# Allegro board BeagleBone-AI_RevA2_PCB_200527.brd
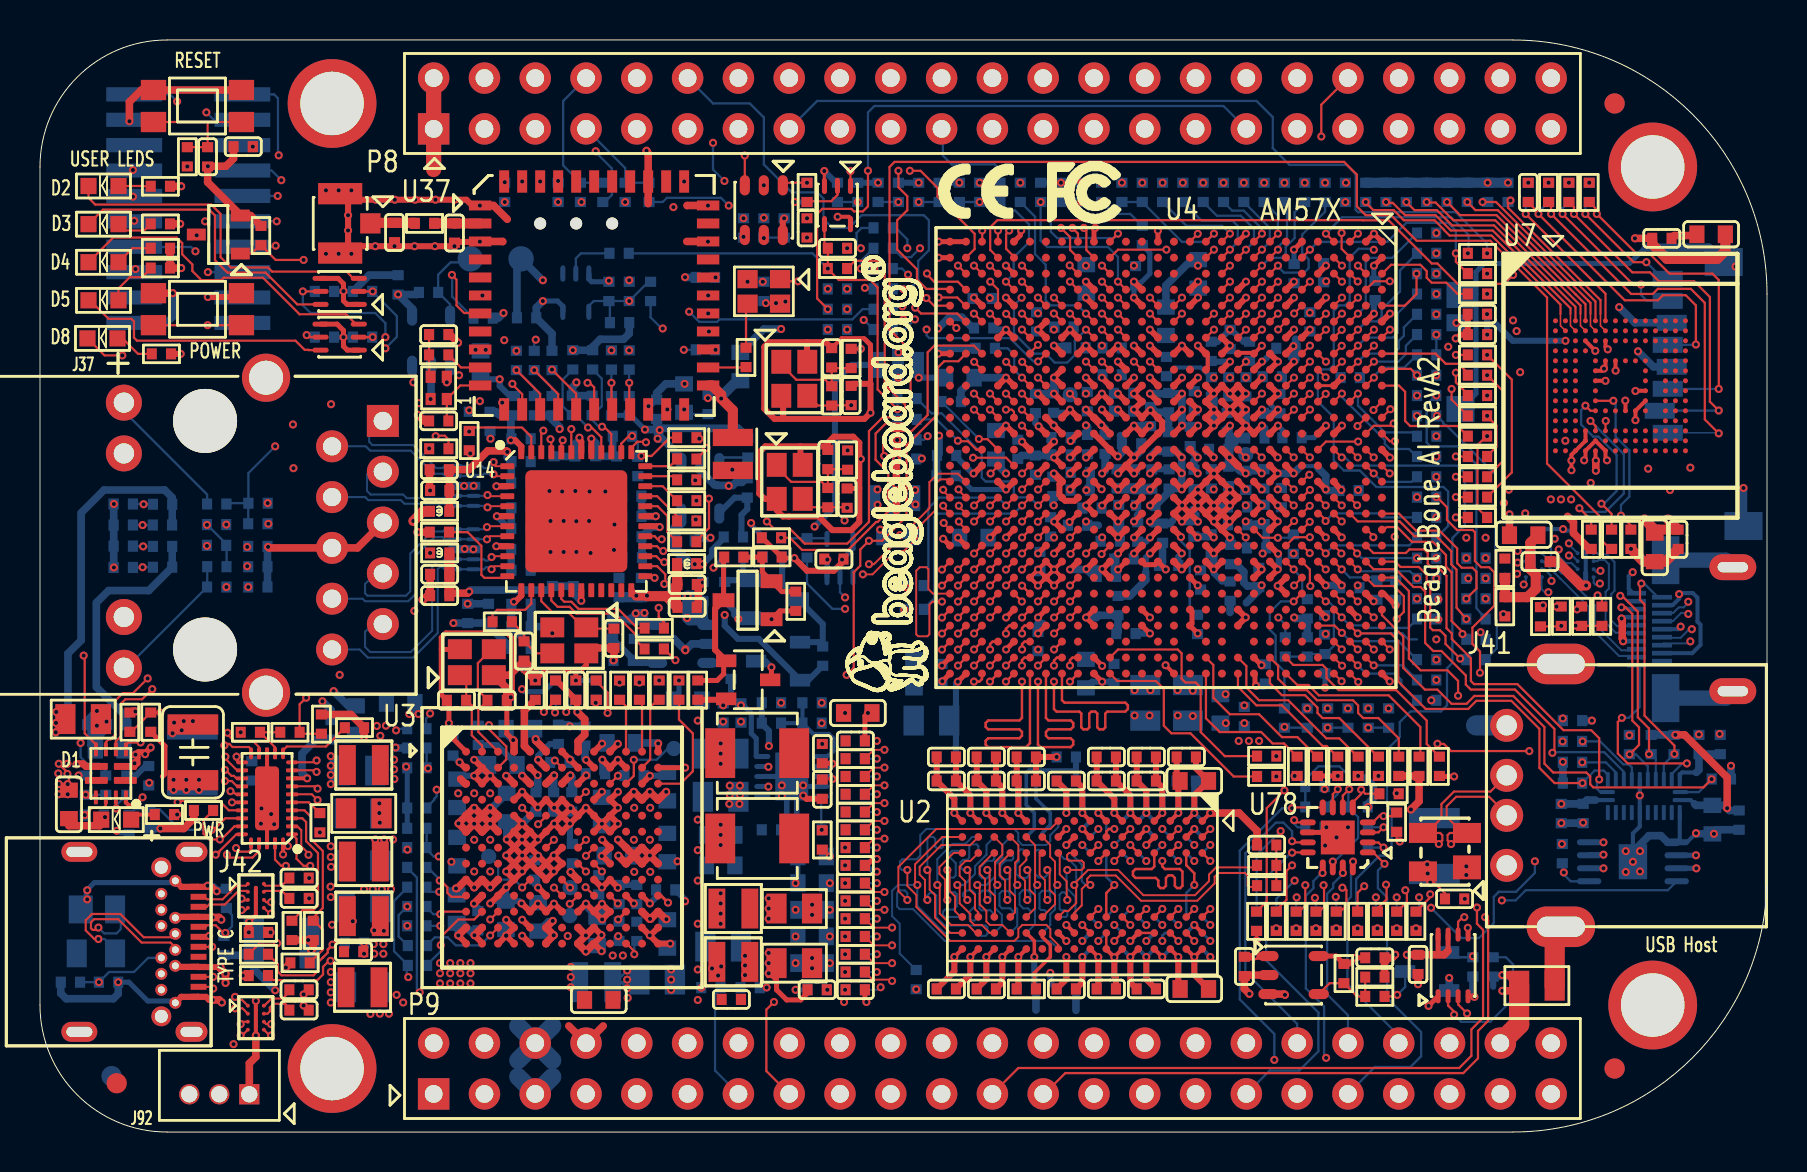
[diagram p0: board, top side]
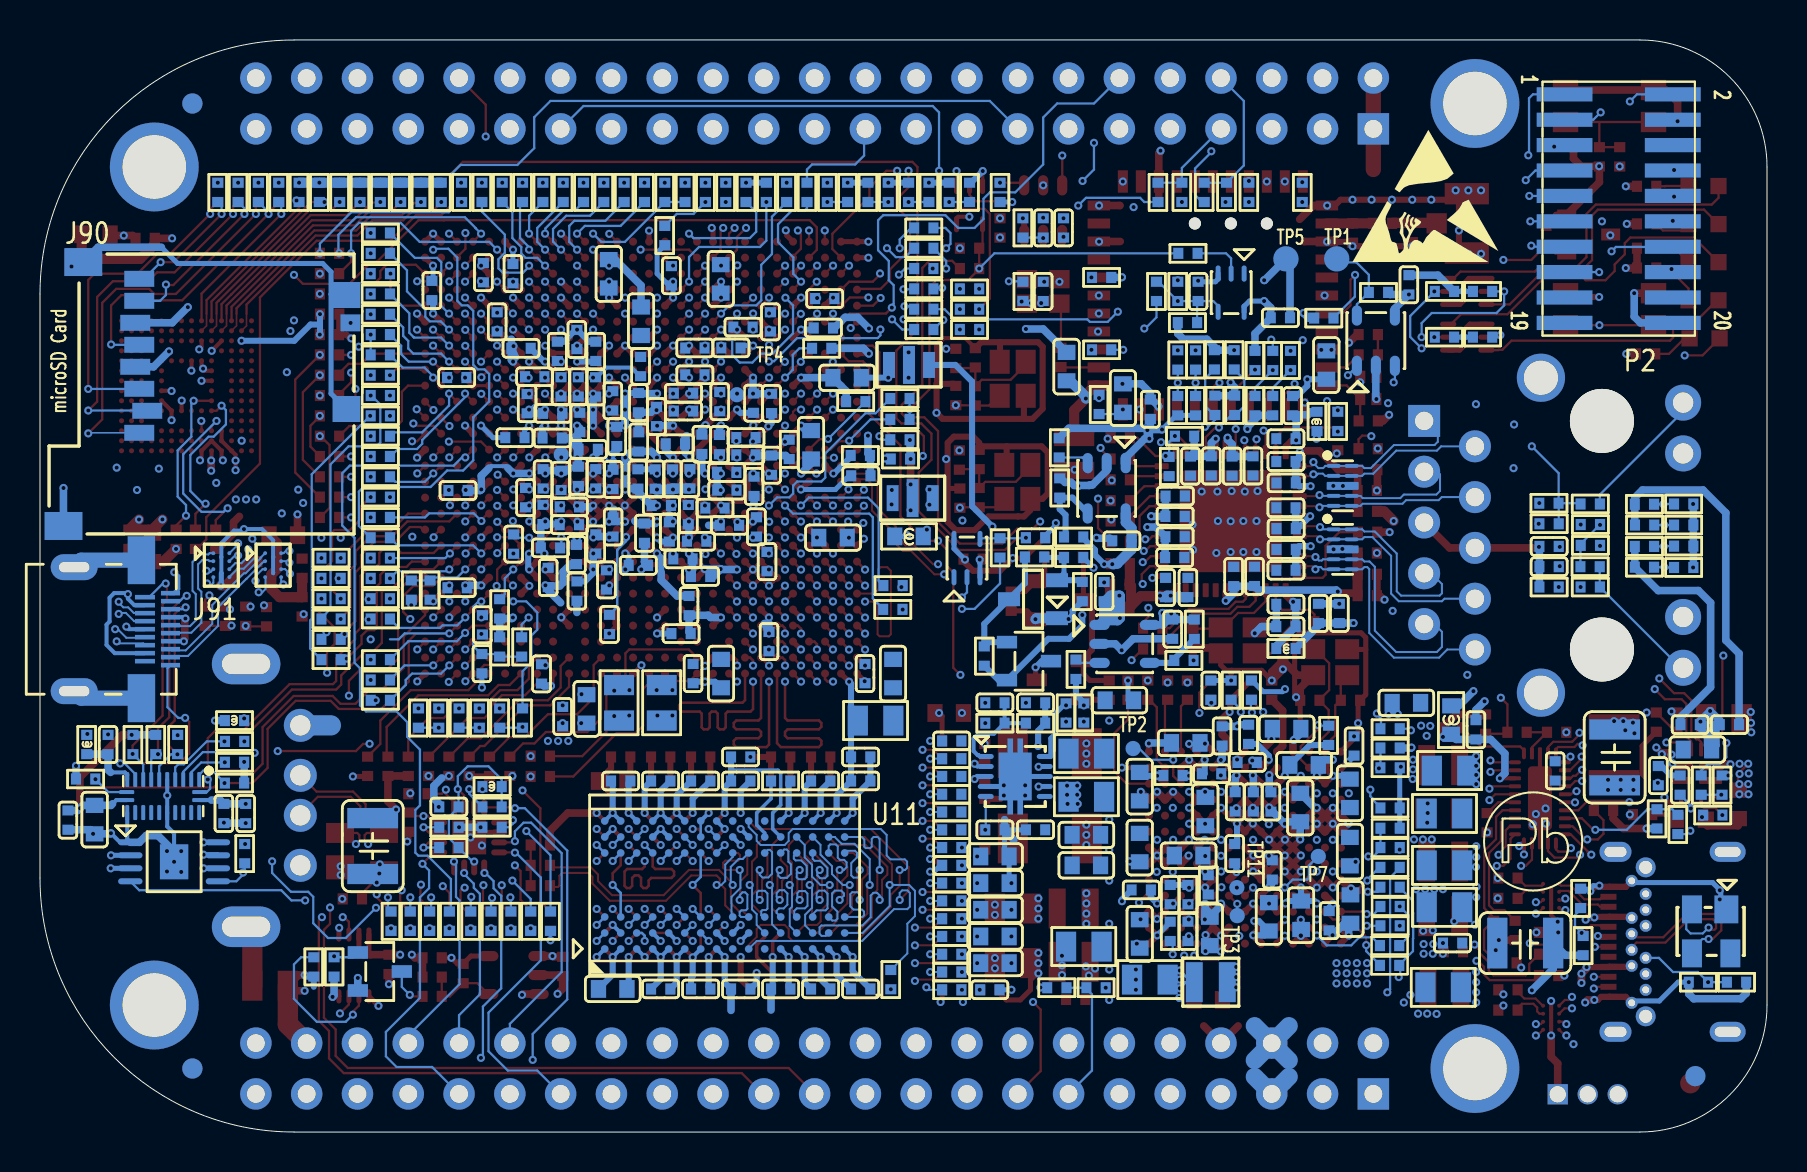
[diagram p1: board, bottom side, seen from below]

Outline 86.36 x 54.61 mm; copper layers: TOP, GND_L2, INT_L3, GND_L4, SIG_L5, PWR_L6, PWR_L7, SIG_L8, GND_L9, SIG_L10, GND_L11, BOTTOM. Coordinates in mm from the lower left corner of the outline.
Outline path: 0,48.26 0,6.35 arc(1.86,1.86) 6.35,0 73.66,0 arc(82.64,3.72) 86.36,12.7 86.36,41.91 arc(82.64,50.89) 73.66,54.61 6.35,54.61 arc(1.86,52.75) 0,48.26

## Design rules (mm)
constraint set DEFAULT: min track width 0.114, pair gap 0.254
net group DDR1_DQS0: nets DDR1_DQS0 DDR1_DQSN0
net group DDR1_DQS2: nets DDR1_DQS2 DDR1_DQSN2
net group DIFFPAIR2: nets DDR1_CLK0 DDR1_CLK0N
net group HDMI_CK: nets HDMI_CKN HDMI_CKP
net group HDMI_CLK: nets HDMI_CLKN HDMI_CLKP
net group HDMI_DATA0: nets HDMI_DATA0N HDMI_DATA0P
net group HDMI_DATA1: nets HDMI_DATA1N HDMI_DATA1P
net group HDMI_DATA2: nets HDMI_DATA2N HDMI_DATA2P
net group HDMI_T0: nets HDMI_T0N HDMI_T0P
net group HDMI_T1: nets HDMI_T1N HDMI_T1P
net group HDMI_T2: nets HDMI_T2N HDMI_T2P
net group PHY_TD_A: nets PHY_TD_A_M PHY_TD_A_P
net group PHY_TD_B: nets PHY_TD_B_M PHY_TD_B_P
net group PHY_TD_D: nets PHY_TD_D_M PHY_TD_D_P
net group PHY_TX_C: nets PHY_TD_C_M PHY_TD_C_P
net group SSRX1: nets SSRX1+ SSRX1-
net group SSRX1A: nets SSRX1N_A SSRX1P_A
net group SSRX2: nets SSRX2+ SSRX2-
net group SSRX2A: nets SSRX2N_A SSRX2P_A
net group SSTX1: nets SSTX1+ SSTX1-
net group SSTX1A: nets SSTX1N_A SSTX1P_A
net group SSTX1C: nets SSTX1N_C SSTX1P_C
net group SSTX2: nets SSTX2+ SSTX2-
net group SSTX2A: nets SSTX2N_A SSTX2P_A
net group SSTX2C: nets SSTX2N_C SSTX2P_C
net group USB1_D: nets USB1_DM USB1_DP
net group USB2_D: nets USB2_DM USB2_DP
net group USB_RXP0: nets USB_RXN0 USB_RXP0
net group USB_TXP0: nets USB_TXN0 USB_TXP0
net group DDR1_DQ0: nets DDR1_D0 DDR1_D1 DDR1_D2 DDR1_D3 DDR1_D4 DDR1_D5 DDR1_D6 DDR1_D7 DDR1_DQM0
net group DDR1_DQ1: nets DDR1_D8 DDR1_D9 DDR1_D10 DDR1_D11 DDR1_D12 DDR1_D13 DDR1_D14 DDR1_D15 DDR1_DQM1 DDR1_DQS1 DDR1_DQSN1
net group DDR1_DQ2: nets DDR1_D16 DDR1_D17 DDR1_D18 DDR1_D19 DDR1_D20 DDR1_D21 DDR1_D22 DDR1_D23 DDR1_DQM2
net group DDR1_DQ3: nets DDR1_D24 DDR1_D25 DDR1_D26 DDR1_D27 DDR1_D28 DDR1_D29 DDR1_D30 DDR1_D31 DDR1_DQM3 DDR1_DQS3 DDR1_DQSN3
net group MMC4_DAT: nets MMC4_DATA0 MMC4_DATA1 MMC4_DATA2 MMC4_DATA3
net group RGMIIO_RX: nets RGMII0_RXC RGMII0_RXCTL RGMII0_RXD0 RGMII0_RXD1 RGMII0_RXD2 RGMII0_RXD3
net group RGMIIO_TXC: nets RGMII0_TXC RGMII0_TXCTL RGMII0_TXD0 RGMII0_TXD1 RGMII0_TXD2 RGMII0_TXD3

## Placement (name value [footprint] x y rotation side)
C1  0.001uF  [C0402]  38.61 21.46 0 bottom
C2  4.7uF  [C0603]  22.03 38.35 270 bottom
C3  4.7uF  [C0603]  32.21 36.7 90 bottom
C4  10uF  [C0603]  40.89 20.96 180 top
C5  0.1uF  [C0402]  39.12 18.92 90 top
C6  0.1uF  [C0402]  39.12 17.14 270 top
C7  10uF  [C0603]  38.61 8.45 180 bottom
C8  0.1uF  [C0402]  36.58 15.11 0 bottom
C9  0.01uF  [C0402]  45.32 7.15 180 top
C10  0.01uF  [C0402]  53.32 18.75 0 top
C11  0.01uF  [C0402]  55.32 18.75 0 top
C12  47uF  [C0805]  37.72 11.18 0 top
C13  24pF  [C0402]  40.36 31.7 90 top
C14  24pF  [C0402]  39.4 33.63 90 top
C15  24pF  [C0402]  40.56 36.83 90 top
C16  24pF  [C0402]  39.59 38.72 90 top
C17  0.01uF  [C0402]  47.32 18.75 180 top
C18  0.01uF  [C0402]  45.32 18.75 180 top
C19  0.01uF  [C0402]  47.32 17.55 180 top
C20  0.1uF  [C0402]  51.32 17.55 180 top
C21  2.2uF  [C0603]  18.03 21.46 180 bottom
C22  0.01uF  [C0402]  45.32 17.55 180 top
C23  0.01uF  [C0402]  49.32 17.55 180 top
C24  0.01uF  [C0402]  53.32 17.55 0 top
C25  0.01uF  [C0402]  55.32 17.55 0 top
C26  47uF  [C0805]  44.58 20.57 180 bottom
C27  0.1uF  [C0402]  17.91 42.37 270 bottom
C28  0.1uF  [C0402]  14.55 20.11 90 bottom
C29  47uF  [C1210]  12.09 9.45 180 bottom
C30  4.7uF  [C0603]  83.63 15.62 270 bottom
C31  220pF  [C0402]  84.96 15.6 270 bottom
C32  220pF  [C0402]  77.17 15.93 270 bottom
C33  4.7uF  [C0603]  3.48 19.13 180 bottom
C34  0.1uF  [C0402]  3.84 20.37 180 bottom
C35  0.1uF  [C0402]  51.32 7.15 180 top
C36  0.01uF  [C0402]  55.32 7.15 0 top
C37  10uF  [C0603]  46 37.72 0 bottom
C38  2.2uF  [C0402]  26.8 22.1 90 top
C39  22uF  [C0603]  57.72 7.15 0 top
C40  0.01uF  [C0402]  53.32 7.15 0 top
C41  0.1uF  [C0402]  38.86 7.11 180 bottom
C42  0.1uF  [C0402]  40.77 7.11 0 top
C43  2.2uF  [C0402]  24.77 22.1 90 top
C44  1uF  [C0402]  4.34 17.35 90 bottom
C45  10UF  [C0402]  19.99 27.89 180 top
C46  0.01uF  [C0402]  19.99 26.82 180 top
C47  1uF  [C0402]  28.83 33.3 270 bottom
C48  0.1uF  [C0402]  27.79 33.31 270 bottom
C49  0.1uF  [C0402]  61.34 14.35 180 top
C50  1uF  [C0402]  29.62 28.73 180 bottom
C51  15pF  [C0402]  22.86 21.59 180 top
C52  15pF  [C0402]  20.83 21.59 0 top
C53  0.1uF  [C0402]  29.6 29.77 180 bottom
C54  1uF  [C0402]  25.63 27.79 90 bottom
C55  0.1uF  [C0402]  26.67 27.78 90 bottom
C56  10UF  [C0402]  19.99 32.08 180 top
C57  0.01uF  [C0402]  19.96 33.12 180 top
C58  22uF  [C0603]  57.72 7.15 0 bottom
C59  1uF  [C0402]  24.05 28.09 0 bottom
C60  0.1uF  [C0402]  38.86 7.11 180 top
C61  0.1uF  [C0402]  40.77 13.34 0 top
C62  0.1uF  [C0402]  24.05 29.13 0 bottom
C63  1uF  [C0402]  24.05 33.53 0 bottom
C64  0.1uF  [C0402]  24.05 32.46 0 bottom
C65  10UF  [C0402]  32.36 27.38 0 top
C66  0.01uF  [C0402]  32.36 26.24 0 top
C67  1uF  [C0402]  29.59 31.8 180 bottom
C68  15pF  [C0402]  19.94 35.56 180 top
C69  0.1uF  [C0402]  36.58 29.72 180 bottom
C70  0.1uF  [C0402]  29.6 30.78 180 bottom
C71  1uF  [C0402]  25.7 33.31 270 bottom
C72  0.1uF  [C0402]  26.75 33.3 270 bottom
C73  1uF  [C0402]  24.05 31.22 0 bottom
C74  0.1uF  [C0402]  24.05 30.18 0 bottom
C75  1uF  [C0402]  28.96 27.23 90 bottom
C76  0.1uF  [C0402]  30.07 27.23 90 bottom
C77  1uF  [C0402]  29.72 25.15 270 bottom
C78  1uF  [C0402]  33.15 27.03 90 bottom
C79  0.01uF  [C0402]  39.7 28.65 180 top
C80  0.1uF  [C0402]  39.88 44.2 0 top
C81  0.1uF  [C0402]  35.18 45.21 270 bottom
C82  1uF  [C0402]  30.84 36.14 90 bottom
C83  1uF  [C0402]  32.26 29.57 0 bottom
C84  0.01uF  [C0402]  24.33 40.72 180 bottom
C85  1uF  [C0402]  24.05 25.27 0 bottom
C86  0.1uF  [C0402]  24.05 26.39 0 bottom
C87  0.1uF  [C0402]  36.2 45.21 270 bottom
C88  0.1uF  [C0402]  38.35 45.21 90 top
C89  10uF  [C0603]  57.72 17.55 0 top
C90  10uF  [C0603]  38.61 13.78 180 bottom
C91  10uF  [C0603]  38.61 12.45 180 bottom
C92  10pF  [C0402]  38.61 15.11 180 bottom
C93  47uF  [C0805]  34.16 9.27 180 bottom
C94  47uF  [C0805]  37.72 8.45 0 top
C95  0.01uF  [C0402]  45.32 7.15 180 bottom
C96  22uF  [C0603]  34.04 14.86 180 bottom
C97  0.01uF  [C0402]  45.32 18.75 180 bottom
C98  0.1uF  [C0402]  51.32 17.55 180 bottom
C99  0.1uF  [C0402]  51.32 18.75 0 bottom
C100  0.01uF  [C0402]  57.32 17.55 0 bottom
C101  0.01uF  [C0402]  55.32 17.55 0 bottom
C102  0.01uF  [C0402]  53.32 17.55 0 bottom
C103  0.01uF  [C0402]  47.32 17.55 180 bottom
C104  0.01uF  [C0402]  45.32 17.55 180 bottom
C105  47uF  [C0805]  34.04 18.92 180 bottom
C106  1uF  [C0402]  51.06 34.73 180 bottom
C107  1uF  [C0402]  51.06 33.86 180 bottom
C108  1uF  [C0402]  52.02 32.99 0 bottom
C109  1uF  [C0402]  52.01 32.1 0 bottom
C110  10UF  [C0402]  28.96 10.03 270 bottom
C111  47uF  [C0805]  34.04 16.76 180 bottom
C112  10UF  [C0402]  59.54 28.88 270 bottom
C113  10uF  [C0603]  31.37 9.91 270 bottom
C114  4.7uF  [C0603]  31.37 14.22 270 bottom
C115  4.7uF  [C0603]  31.37 17.27 90 bottom
C116  10uF  [C0603]  47.8 34.37 90 bottom
C117  2.2uF  [C0402]  31.29 12.11 0 bottom
C118  0.01uF  [C0402]  45.1 22.92 270 bottom
C119  0.01uF  [C0402]  54.3 24.92 180 bottom
C120  10uF  [C0603]  43.7 22.92 270 bottom
C121  2.2uF  [C0402]  29.84 11.87 90 bottom
C122  0.01uF  [C0402]  47.12 41.68 0 bottom
C123  0.1uF  [C0402]  45.31 32.82 180 bottom
C124  10uF  [C0603]  46.7 29.73 0 bottom
C125  0.01uF  [C0402]  47.19 40.21 180 bottom
C126  2.2uF  [C0603]  29.07 19.46 0 bottom
C127  4.7uF  [C0603]  28.92 13.82 180 bottom
C128  4.7uF  [C0603]  27.94 6.6 0 top
C129  10UF  [C0402]  21.39 25.93 90 bottom
C130  10uF  [C0603]  28.09 16.03 270 bottom
C131  0.01uF  [C0402]  49.9 24.52 270 bottom
C132  4.7uF  [C0603]  27.86 10.03 90 bottom
C133  2.2uF  [C0402]  27.77 17.92 0 bottom
C134  2.2uF  [C0402]  27.25 19.81 90 bottom
C135  0.01uF  [C0402]  22.43 25.93 90 bottom
C136  0.01uF  [C0402]  49.78 36.43 90 bottom
C137  1uF  [C0402]  23.72 36.32 90 bottom
C138  0.01uF  [C0402]  49.78 33.35 90 bottom
C139  0.01uF  [C0402]  26.59 16.51 270 bottom
C140  0.01uF  [C0402]  50 28.52 90 bottom
C141  0.01uF  [C0402]  47.32 7.15 180 bottom
C142  0.1uF  [C0402]  24.05 34.67 0 bottom
C143  0.1uF  [C0402]  51.32 7.15 0 bottom
C144  0.1uF  [C0402]  49.32 7.15 180 bottom
C145  0.01uF  [C0402]  26.62 13.92 90 bottom
C146  0.01uF  [C0402]  50.53 30.26 270 bottom
C147  0.1uF  [C0402]  26 18.48 180 bottom
C148  0.01uF  [C0402]  50.68 36.45 90 bottom
C149  0.1uF  [C0402]  50.65 32.29 270 bottom
C151  2.2uF  [C0402]  25.69 16.51 270 bottom
C152  2.2uF  [C0402]  25.92 19.89 90 bottom
C153  0.1uF  [C0402]  40.77 13.34 0 bottom
C154  0.01uF  [C0402]  51.21 40.25 180 bottom
C155  0.01uF  [C0402]  49.83 40.51 90 bottom
C156  4.7uF  [C0603]  24.91 10.76 90 bottom
C157  2.2uF  [C0402]  24.81 16.5 270 bottom
C158  0.01uF  [C0402]  51.88 30.34 0 bottom
C159  0.1uF  [C0402]  52.38 34.38 90 bottom
C161  10uF  [C0603]  52.32 42.66 90 bottom
C162  0.01uF  [C0402]  53.7 22.92 270 bottom
C163  0.1uF  [C0402]  52.37 36.52 90 bottom
C164  2.2uF  [C0603]  24.02 20.17 180 bottom
C165  0.01uF  [C0402]  52.61 31.2 0 bottom
C166  0.01uF  [C0402]  53.32 7.15 0 bottom
C168  10UF  [C0402]  60.22 20.78 90 bottom
C169  2.2uF  [C0603]  23.34 16.23 270 bottom
C170  10uF  [C0603]  23.3 10.84 90 bottom
C171  0.01uF  [C0402]  54.58 34.42 0 bottom
C172  2.2uF  [C0603]  23.15 18.36 0 bottom
C174  0.01uF  [C0402]  53.33 27.78 0 bottom
C175  0.01uF  [C0402]  53.52 29.54 180 bottom
C176  10UF  [C0402]  53.61 39.21 180 bottom
C177  10UF  [C0402]  53.61 37.87 0 bottom
C178  0.01uF  [C0402]  53.86 32.67 90 bottom
C179  1uF  [C0402]  54.21 28.66 180 bottom
C180  10uF  [C0603]  52.3 22.92 270 bottom
C181  0.01uF  [C0402]  53.94 30.88 90 bottom
C182  0.01uF  [C0402]  54.18 36.95 0 bottom
C183  10UF  [C0402]  54.18 36.05 0 bottom
C184  0.1uF  [C0402]  53.26 34.39 270 bottom
C185  0.01uF  [C0402]  54.73 32.66 90 bottom
C186  0.01uF  [C0402]  54.79 42.82 90 bottom
C187  0.01uF  [C0402]  54.89 30.01 90 bottom
C188  22uF  [C0603]  59.03 21.16 90 bottom
C189  0.01uF  [C0402]  55.29 31.33 180 bottom
C190  0.01uF  [C0402]  55.53 35.78 90 bottom
C192  47uF  [C0805]  30.86 7.62 0 bottom
C193  0.01uF  [C0402]  55.6 32.66 90 bottom
C194  4.7uF  [C0603]  20.83 11.15 270 bottom
C195  4.7uF  [C0603]  20.86 14.02 270 bottom
C196  4.7uF  [C0603]  20.86 16.94 90 bottom
C197  0.01uF  [C0402]  56.13 29.95 270 bottom
C198  10uF  [C0603]  56.3 40.54 90 bottom
C199  0.01uF  [C0402]  56.42 34.51 90 bottom
C200  10UF  [C0402]  56.44 36.48 270 bottom
C201  0.01uF  [C0402]  56.44 28.34 180 bottom
C202  0.01uF  [C0402]  56.46 32.66 90 bottom
C203  0.01uF  [C0402]  57.51 34.78 270 bottom
C204  1uF  [C0402]  53.9 26.32 270 bottom
C205  0.01uF  [C0402]  57.7 32.64 90 bottom
C206  0.01uF  [C0402]  57.7 30.26 270 bottom
C207  0.01uF  [C0402]  57.72 36.57 90 bottom
C208  10uF  [C0603]  57.92 42.92 90 bottom
C209  0.01uF  [C0402]  58.03 27.61 90 bottom
C210  0.01uF  [C0402]  56.33 38.28 270 bottom
C211  0.01uF  [C0402]  58.57 29.41 90 bottom
C212  0.01uF  [C0402]  58.57 32.67 270 bottom
C213  0.01uF  [C0402]  49.32 18.75 180 top
C214  1uF  [C0402]  57.88 25.38 270 bottom
C215  10UF  [C0402]  58.58 37.26 90 bottom
C216  1uF  [C0402]  58.94 34.14 0 bottom
C217  10UF  [C0402]  59.37 35.48 270 bottom
C218  0.01uF  [C0402]  59.51 39.63 90 bottom
C220  0.01uF  [C0402]  59.44 37.26 90 bottom
C221  0.01uF  [C0402]  59.89 31.26 0 bottom
C222  0.01uF  [C0402]  59.89 30.37 0 bottom
C223  0.01uF  [C0402]  59.44 32.79 90 bottom
C224  0.01uF  [C0402]  59.51 27.05 270 bottom
C225  0.1uF  [C0402]  40.77 19.56 0 top
C226  0.1uF  [C0402]  40.77 19.56 0 bottom
C227  0.01uF  [C0402]  55.32 7.15 0 bottom
C230  0.01uF  [C0402]  47.32 7.15 180 top
C231  0.01uF  [C0402]  57.32 18.75 0 top
C232  0.01uF  [C0402]  60.31 37.26 90 bottom
C233  0.01uF  [C0402]  60.72 35.94 0 bottom
C234  0.01uF  [C0402]  60.75 34.71 180 bottom
C235  0.01uF  [C0402]  60.95 27.73 270 bottom
C236  0.01uF  [C0402]  61.21 30.88 270 bottom
C237  0.01uF  [C0402]  61.28 22.91 270 bottom
C238  0.01uF  [C0402]  24.74 13.11 90 bottom
C242  0.01uF  [C0402]  62.61 34.72 0 bottom
C245  0.01uF  [C0402]  62 36.42 270 bottom
C254  1uF  [C0402]  60.83 29.21 0 bottom
C255  0.01uF  [C0402]  15.68 9.02 0 top
C256  0.01uF  [C0402]  21.89 10.57 270 bottom
C257  0.01uF  [C0402]  15.72 9.45 0 bottom
C258  0.01uF  [C0402]  20.65 19.3 90 bottom
C259  0.01uF  [C0402]  62.71 42.92 90 bottom
C260  1uF  [C0402]  62.67 29.4 270 bottom
C261  0.01uF  [C0402]  64.19 42.97 270 bottom
C262  0.01uF  [C0402]  64.24 25.36 270 bottom
C263  47uF  [C0805]  16.13 11.24 0 bottom
C264  47uF  [C0805]  16.19 7.24 0 bottom
C265  47uF  [C0805]  16.13 13.34 0 bottom
C266  47uF  [C0805]  16.19 15.94 0 top
C267  0.1uF  [C0402]  64.26 23.42 270 bottom
C268  1.5pF  [C0402]  17.73 44.98 270 top
C269  0.01uF  [C0402]  65.46 32.08 0 bottom
C270  0.01uF  [C0402]  65.5 27.22 0 bottom
C271  0.01uF  [C0402]  65.52 37.73 0 bottom
C272  0.01uF  [C0402]  66.77 42.08 90 bottom
C273  1uF  [C0402]  61.2 32.66 90 bottom
C274  1uF  [C0402]  62.31 39.19 0 bottom
C275  1uF  [C0402]  61.62 37.77 0 bottom
C276  1uF  [C0402]  58.57 39.04 90 bottom
C277  1uF  [C0402]  60.49 39.04 90 bottom
C278  2.2uF  [C0603]  80.75 29.24 270 top
C279  1uF  [C0402]  60.3 32.59 90 bottom
C281  0.1uF  [C0402]  71.88 39.88 180 top
C282  2.2uF  [C0603]  74.19 29.85 180 top
C283  1uF  [C0402]  71.88 40.9 0 top
C285  0.1uF  [C0402]  75.01 28.52 0 top
C286  0.1uF  [C0402]  81.92 29.64 270 top
C291  10uF  [C0603]  38.61 11.11 180 bottom
C292  10uF  [C0603]  38.61 9.78 180 bottom
C293  47uF  [C0805]  55.27 21.46 90 bottom
C294  47uF  [C0805]  57.4 21.46 90 bottom
C295  10uF  [C0603]  34.04 13.34 180 bottom
C296  10UF  [C0402]  34.57 6.63 180 top
C297  47uF  [C0805]  15.88 18.07 0 bottom
C298  47uF  [C0805]  16.13 15.93 0 bottom
C299  0.01uF  [C0402]  62.08 31.72 90 bottom
C300  10uF  [C0603]  83.57 44.89 0 top
C320  0.1uF  [C0402]  27.81 22.1 90 bottom
C321  0.1uF  [C0402]  8.38 48.77 270 top
C325  0.1uF  [C0402]  81.1 44.69 0 top
C326  47uF  [C1210]  69.72 14.3 90 bottom
C327  0.1uF  [C0402]  70.74 11.66 180 top
C334  27pF  [C0402]  28.7 24.69 270 top
C335  0.1uF  [C0402]  10.9 29.29 180 bottom
C336  0.1uF  [C0402]  10.9 28.27 180 bottom
C337  27pF  [C0402]  24.21 24.05 270 top
C353  0.1uF  [C0402]  68.91 8.38 90 top
C443  0.1uF  [C0402]  12.95 12.7 0 top
C444  0.1uF  [C0402]  12.95 11.68 0 top
C445  0.1uF  [C0402]  12.95 6.1 0 top
C446  0.1uF  [C0402]  12.95 7.11 0 top
C456  4.7uF  [C0603]  1.45 16.38 270 top
C457  0.1uF  [C0402]  1.88 20.37 0 bottom
C461  10uF  [C0603]  32.39 21.59 180 bottom
C462  0.001uF  [C0402]  36.58 21.46 0 bottom
C463  15pF  [C0402]  19.94 39.88 0 top
C464  4.7uF  [C0603]  35.03 38.28 90 bottom
C466  0.1uF  [C0402]  65.91 16.26 0 bottom
C472  0.1uF  [C0402]  36.2 42.04 90 bottom
C473  5pF  [C0402]  74.42 46.99 90 top
C480  1uF  [C0402]  10.59 18.06 90 bottom
C481  100uF  [C1210]  7.62 18.73 90 bottom
C482  100uF  [C1210]  7.65 18.99 90 top
C483  0.01uF  [C0402]  5.44 17.82 90 bottom
C488  1pF  [C0402]  20.73 44.96 270 top
C489  1uF  [C0402]  60.22 8.28 270 top
C490  1uF  [C0402]  66.75 8.71 0 top
C491  0.1uF  [C0402]  10.16 49.28 180 top
C492  0.1uF  [C0402]  51.81 39.21 180 bottom
C495  1uF  [C0402]  28.45 42.04 90 bottom
C496  0.1uF  [C0402]  63.5 40.51 270 bottom
C497  0.1uF  [C0402]  76.07 15.93 270 bottom
C498  0.1uF  [C0402]  82.96 19.38 90 bottom
D1  Green  [D0603]  3.81 15.62 180 top
D2  Green  [D0603]  3.18 47.31 180 top
D3  Green  [D0603]  3.18 45.4 180 top
D4  Green  [D0603]  3.18 43.5 180 top
D5  Green  [D0603]  3.18 41.59 180 top
D6  TLVH431CDBZT  [SOT95P240X120-3N]  36.7 26.64 0 bottom
D7  TLVH431CDBZT  [SOT95P240X120-3N]  35.38 26.59 180 top
D8  Green  [D0603]  3.12 39.69 180 top
D46  ESD0402-V05L  [D0402]  9.19 9.32 90 bottom
D47  ESD0402-V05L  [D0402]  3.43 7.49 180 bottom
D78  PRTR5V0U2X,215  [SOT143_190P240X115-4N]  2.79 10.03 0 bottom
D79  PRTR5V0U2X,215  [SOT143_190P240X115-4N]  70.26 14 90 top
FB1  180R  [L0603]  15.8 20.6 270 bottom
FB2  120ohm  [L0402]  24.05 24.18 0 bottom
FB3  120ohm  [L0402]  19.99 28.96 0 top
FB4  120ohm  [L0402]  76.63 20.57 180 bottom
FB5  120ohm  [L0402]  63.75 17.27 180 bottom
FB6  180R  [L0603]  42.91 29.79 0 bottom
FB7  120ohm  [L0402]  84.02 19.38 270 bottom
FB8  120ohm  [L0402]  19.98 31.04 0 top
FB9  120ohm  [L0402]  32.34 28.42 180 top
FB10  120ohm  [L0402]  22.5 35.53 90 bottom
FL1  NFM21PC474R1C3D  [FL0805]  42.91 38.36 0 bottom
FL2  NFM21PC474R1C3D  [FL0805]  42.72 31.7 0 bottom
ID1  NI  [FD40]  78.74 51.43 0 top
ID2  NI  [FD40]  78.74 3.17 0 top
ID3  NI  [FD40]  3.84 2.44 0 top
J33  U.FL-R-SMT-1(10)  [ANT3S_26X26]  15.01 45.44 90 top
J37  JTRJ45-4118NLF  [RJ45_MTCONN_JTRJ45-4118NLF]  8.16 29.85 270 top
J41  UB11123-4H9-4F  [USB_A_SH]  76.05 16.84 90 top
J42  UBF31-0170  [USB_MTCONN_UBF31-0170]  7.88 9.51 270 top
J90  MCTF-0606  [SD_HSF-COMPLIANT_MCTF-0606]  78.26 36.91 90 bottom
J91  10118241-001RLF  [HDMIS19_4P4]  84.65 25.15 270 bottom
J92  B3B-ZR(LF)(SN)  [CON3B35X60]  8.97 2.34 180 top
L1  1uH  [L40X40_B]  35.86 18.95 0 top
L2  1uH  [L40X40_B]  35.86 14.68 0 top
L16  1uH  [INDPW250X200X105N]  34.67 11.18 0 top
L17  1uH  [INDPW250X200X105N]  16.19 13.53 180 top
L18  1uH  [INDPW250X200X105N]  16.19 10.79 180 top
L19  1uH  [INDPW250X200X105N]  16.13 7.24 180 top
L20  1uH  [INDPW250X200X105N]  16.19 18.35 180 top
L21  1uH  [INDPW250X200X105N]  34.67 8.51 0 top
L22  1uH  [INDPW250X200X105N]  27.81 7.49 0 bottom
L30  4.7uH  [L25X20]  34.65 33.91 90 top
MH1  NI  [MTGH200C125D_PL]  80.65 48.26 0 top
MH2  NI  [MTGH200C125D_PL]  14.61 51.43 0 top
MH3  NI  [MTGH200C125D_PL]  80.65 6.35 0 top
MH4  NI  [MTGH200C125D_PL]  14.61 3.17 0 top
NOREF  -  []  0 48.26 0 top
NOREF#2  -  []  -235.81 -133.55 0 top
NOREF#3  -  []  6.35 0 90 top
NOREF#4  -  [unnamed#2]  78.74 3.17 180 bottom
NOREF#5  -  []  21.23 43.69 180 bottom
NOREF#6  -  [unnamed#2]  78.74 51.43 180 bottom
NOREF#7  -  [unnamed#2]  3.58 2.79 180 bottom
OSC1  32.768KHz  [X4S25X20]  36.2 42.04 180 top
P2  CTI JTAG,DNI  [HEADER10X2_SMD]  7.42 46.18 270 bottom
P8  2.54mm 2x23  [H2X23MZ]  47.62 51.43 0 top
P9  2.54mm 2x23  [H2X23MZ]  47.62 3.17 0 top
Q1  MMBT2907A  [SOT23_123]  36.91 23.55 270 bottom
Q4  MMBT2907A  [SOT23_123]  35.41 22.61 270 top
Q17  2N7002  [SOT23_123]  69.37 8.03 270 bottom
Q18  BSS138LT1G  [SOT95P240X111-3N]  8.92 44.88 180 top
R1  10K  [R0402]  38.61 20.45 0 bottom
R2  10K  [R0402]  36.58 20.45 180 bottom
R3  100K  [R0402]  35.05 20.96 90 bottom
R4  10K  [R0402]  34.16 20.96 90 bottom
R5  0R  [R0402]  35.51 7.21 180 bottom
R6  0R  [R0402]  33.55 7.21 0 bottom
R7  0R  [R0402]  45.34 33.83 0 bottom
R8  10K  [R0402]  34.67 28.73 0 bottom
R9  499R  [R0402]  39.14 23.8 90 bottom
R10  0R  [R0402]  48.89 34.14 90 bottom
R11  1M  [R0402]  39.4 31.72 90 top
R12  1M  [R0402]  39.59 36.81 90 top
R13  10K  [R0402]  36.63 28.75 0 bottom
R14  0R  [R0402]  40.39 33.6 270 top
R15  0R  [R0402]  40.56 38.68 270 top
R16  10K  [R0402]  84.08 17.65 180 bottom
R17  40.2K  [R0402]  34.24 27.03 270 bottom
R18  10K  [R0402]  31.95 22.1 270 top
R19  10K  [R0402]  30.96 22.1 270 top
R20  10K  [R0402]  29.97 22.1 270 top
R21  10K  [R0402]  19.43 41.99 0 bottom
R22  240R  [R0402]  49.32 7.15 180 top
R23  0R  [R0402]  27.03 46.99 90 bottom
R24  10K  [R0402]  51.05 46.99 90 bottom
R25  47R  [R0402]  40.77 18.67 180 top
R26  49.9R  [R0402]  61.34 12.32 0 top
R27  10K  [R0402]  25.78 22.1 270 top
R28  0R  [R0402]  29.26 46.99 90 bottom
R29  49.9R  [R0402]  61.34 13.34 0 top
R30  47R  [R0402]  40.77 17.78 180 bottom
R31  47R  [R0402]  40.77 16 180 bottom
R32  909K  [R0402]  14 15.47 90 top
R33  47R  [R0402]  40.77 17.78 180 top
R34  47R  [R0402]  40.77 10.67 180 top
R35  200K  [R0402]  13.67 10.08 90 top
R36  47R  [R0402]  40.77 9.78 180 top
R37  47R  [R0402]  40.77 9.78 180 bottom
R38  100K  [R0402]  54.1 46.99 270 bottom
R39  47R  [R0402]  40.77 8.89 180 bottom
R40  47R  [R0402]  40.77 10.67 180 bottom
R41  10K  [R0402]  12.6 10.08 90 top
R42  47R  [R0402]  40.77 8.89 180 top
R43  47R  [R0402]  40.77 16.89 180 bottom
R44  100K  [R0402]  56.13 46.99 270 bottom
R45  200K  [R0402]  15.72 20.22 180 top
R46  0R  [R0402]  10.52 19.99 180 top
R47  0R  [R0402]  12.5 19.99 180 top
R48  0R  [R0402]  10.92 8.89 0 top
R49  0R  [R0402]  10.92 7.82 0 top
R50  0R  [R0402]  10.92 9.98 180 top
R51  200K  [R0402]  14.07 20.4 270 top
R52  200K  [R0402]  8.18 16.08 0 top
R53  200K  [R0402]  5.5 15.66 90 bottom
R54  10K  [R0402]  36.58 29.72 0 top
R55  0R  [R0402]  38.35 29.21 270 bottom
R56  0R  [R0402]  78.59 29.64 270 top
R57  18K  [R0402]  62.23 20.7 270 bottom
R58  20K  [R0402]  63.37 20.7 90 bottom
R59  10K  [R0402]  5.54 20.5 90 top
R60  0R  [R0402]  4.5 20.5 90 top
R61  10K  [R0402]  76.63 19.53 0 bottom
R62  4.7K  [R0402]  76.63 17.45 180 bottom
R63  4.7K  [R0402]  76.63 18.49 180 bottom
R64  4.7K  [R0402]  81.71 19.38 90 bottom
R65  4.7K  [R0402]  80.57 19.38 90 bottom
R66  10K  [R0402]  79.48 19.38 270 bottom
R67  0R  [R0402]  30.45 46.99 90 bottom
R68  0R  [R0402]  28.14 46.99 90 bottom
R69  0R  [R0402]  4.46 15.38 270 bottom
R70  0R  [R0402]  39.88 43.18 0 top
R71  13K  [R0402]  6.13 31.39 180 bottom
R72  4.7K  [R0402]  4.17 31.41 180 bottom
R73  4.7K  [R0402]  4.17 30.35 180 bottom
R74  10K  [R0402]  37.21 45.21 270 bottom
R75  11K  [R0402]  6.13 28.24 180 bottom
R76  20K  [R0402]  6.13 29.29 180 bottom
R77  0R  [R0402]  4.17 28.23 180 bottom
R78  4.7K  [R0402]  4.17 29.3 180 bottom
R79  30K  [R0402]  2.71 15.85 0 bottom
R80  10K  [R0402]  2.25 17.35 270 bottom
R81  0R  [R0402]  3.29 17.35 90 bottom
R82  10K  [R0402]  38.35 46.99 90 bottom
R83  100R  [R0402]  38.35 46.99 270 top
R84  10R  [R0402]  39.12 14.61 90 top
R85  499R  [R0402]  32.89 22.1 90 top
R86  10K  [R0402]  34.7 28.75 180 top
R87  10K  [R0402]  36.6 28.75 180 top
R88  240R  [R0402]  49.32 17.55 180 bottom
R89  0R  [R0402]  43.36 35.64 180 bottom
R90  0R  [R0402]  43.36 36.68 180 bottom
R91  40.2K  [R0402]  37.8 26.54 270 top
R92  22R  [R0402]  42.16 45.21 180 bottom
R93  22R  [R0402]  42.16 44.2 180 bottom
R94  22R  [R0402]  42.16 43.18 180 bottom
R95  22R  [R0402]  42.16 42.16 180 bottom
R96  22R  [R0402]  42.16 41.15 180 bottom
R97  22R  [R0402]  42.16 40.13 180 bottom
R98  10K  [R0402]  43.36 34.62 180 bottom
R99  10K  [R0402]  43.33 33.66 180 bottom
R100  0R  [R0402]  45.57 36.53 0 bottom
R101  10K  [R0402]  43.7 27.32 180 bottom
R102  10K  [R0402]  43.71 26.14 180 bottom
R103  10K  [R0402]  29.84 10.03 270 bottom
R104  10K  [R0402]  29.7 17.83 180 bottom
R105  0R  [R0402]  23.11 25.51 0 top
R106  33R  [R0402]  32.34 30.56 180 top
R107  10K  [R0402]  28.96 11.87 270 bottom
R108  0R  [R0402]  28.98 22.1 270 top
R109  33R  [R0402]  32.34 31.57 180 top
R110  33R  [R0402]  32.34 32.61 180 top
R111  33R  [R0402]  32.34 33.66 180 top
R112  10K  [R0402]  47.27 39.19 180 bottom
R113  10K  [R0402]  27.94 12.36 90 bottom
R114  33R  [R0402]  32.34 29.51 180 top
R115  33R  [R0402]  32.34 34.72 180 top
R116  33R  [R0402]  30.72 25.2 180 top
R117  33R  [R0402]  30.72 24.16 180 top
R118  11K  [R0402]  19.97 30 180 top
R119  100K  [R0402]  28.64 25.15 270 bottom
R120  27.4K  [R0402]  29.16 23.58 180 bottom
R121  10K  [R0402]  26.8 22.1 270 bottom
R122  10K  [R0402]  34.56 23.14 270 bottom
R123  47R  [R0402]  40.77 14.22 180 top
R124  10K  [R0402]  25.78 22.1 90 bottom
R125  47R  [R0402]  40.77 18.67 180 bottom
R126  47R  [R0402]  40.77 14.22 180 bottom
R127  10K  [R0402]  35.39 34.21 90 bottom
R128  47R  [R0402]  40.77 15.11 180 bottom
R129  47R  [R0402]  40.77 8 180 top
R130  0R  [R0402]  21.92 19.84 90 bottom
R131  47R  [R0402]  40.77 12.45 180 bottom
R132  47R  [R0402]  40.77 16.89 180 top
R133  100K  [R0402]  34.67 29.76 0 bottom
R134  2.2K  [R0402]  50.04 46.99 90 bottom
R135  120K  [R0402]  35.37 32.21 90 bottom
R136  47R  [R0402]  40.77 15.11 180 top
R137  47R  [R0402]  40.77 16 180 top
R138  1K  [R0402]  8.84 27.25 0 bottom
R139  10K  [R0402]  43.81 7.62 270 bottom
R140  47R  [R0402]  40.77 7.11 180 bottom
R141  5.76K  [R0402]  21.46 35.53 270 bottom
R142  47R  [R0402]  40.77 11.56 180 top
R143  47R  [R0402]  40.77 8 180 bottom
R144  1K  [R0402]  8.84 31.41 0 bottom
R145  0R  [R0402]  18.87 8.33 0 bottom
R146  0R  [R0402]  18.87 9.32 0 bottom
R147  1K  [R0402]  18.85 10.31 0 bottom
R148  0R  [R0402]  18.85 11.28 0 bottom
R149  0R  [R0402]  18.85 12.24 0 bottom
R150  1K  [R0402]  18.85 15.19 0 bottom
R151  1K  [R0402]  18.85 14.22 0 bottom
R152  0R  [R0402]  18.85 13.23 180 bottom
R153  1K  [R0402]  8.85 28.27 180 bottom
R154  2.49K  [R0402]  21.46 34.58 270 top
R155  10K  [R0402]  18.85 18.21 0 bottom
R156  10K  [R0402]  18.85 19.2 0 bottom
R157  10K  [R0402]  18.85 16.21 180 bottom
R158  5.76K  [R0402]  8.83 29.34 0 bottom
R159  0R  [R0402]  18.85 20.17 0 bottom
R160  47R  [R0402]  40.77 12.45 180 top
R161  47R  [R0402]  40.77 11.56 180 bottom
R162  100K  [R0402]  45.97 46.99 270 bottom
R163  2.49K  [R0402]  8.83 30.38 0 bottom
R164  100K  [R0402]  41.91 46.99 270 bottom
R165  5.76K  [R0402]  10.9 31.45 180 bottom
R166  2.49K  [R0402]  10.9 30.42 0 bottom
R167  5.76K  [R0402]  29.13 34.8 0 bottom
R168  100K  [R0402]  64.26 46.99 270 bottom
R169  10K  [R0402]  63.37 24.26 90 bottom
R170  5.76K  [R0402]  27.64 38.62 270 bottom
R171  5.76K  [R0402]  26.64 38.62 270 bottom
R172  2.49K  [R0402]  29.9 33.28 270 bottom
R173  100K  [R0402]  69.34 22.61 180 bottom
R174  10K  [R0402]  66.85 27.1 270 bottom
R175  47K  [R0402]  73.41 46.99 270 bottom
R176  47K  [R0402]  71.37 46.99 270 bottom
R177  47K  [R0402]  69.34 46.99 270 bottom
R178  47K  [R0402]  67.31 46.99 270 bottom
R179  47K  [R0402]  66.29 46.99 270 bottom
R180  4.7K  [R0402]  69.34 25.65 180 bottom
R181  2.49K  [R0402]  27.61 36.34 90 bottom
R182  10K  [R0402]  67.79 27.1 90 bottom
R183  0R  [R0402]  74.42 46.99 90 bottom
R184  47K  [R0402]  72.39 46.99 270 bottom
R185  47K  [R0402]  70.36 46.99 270 bottom
R186  47K  [R0402]  68.33 46.99 270 bottom
R187  2.49K  [R0402]  26.62 36.34 90 bottom
R188  47K  [R0402]  77.57 29.64 90 top
R189  4.7K  [R0402]  69.34 26.67 0 bottom
R190  10K  [R0402]  28.98 40.47 0 bottom
R191  4.7K  [R0402]  13 8.46 180 top
R192  4.7K  [R0402]  63.37 26.16 90 bottom
R193  4.7K  [R0402]  69.34 28.7 0 bottom
R194  4.7K  [R0402]  69.34 27.69 0 bottom
R199  22R  [R0402]  69.34 30.73 0 bottom
R200  22R  [R0402]  69.34 29.72 0 bottom
R201  0R  [R0402]  79.55 29.64 270 top
R202  22R  [R0402]  65.28 46.99 90 bottom
R294  100R  [R0402]  19.94 38.86 0 top
R333  33R  [R0402]  23.83 38.58 270 bottom
R334  33R  [R0402]  24.71 38.58 270 bottom
R336  33R  [R0402]  28.58 38.61 270 bottom
R337  33R  [R0402]  29.46 38.61 270 bottom
R338  10K  [R0402]  22.16 40.7 180 bottom
R385  0R  [R0402]  19.23 45.44 0 top
R387  100K  [R0402]  16.13 39.75 180 bottom
R389  100K  [R0402]  14.22 39.75 0 bottom
R390  100K  [R0402]  16.13 42.04 180 bottom
R392  100K  [R0402]  14.22 42.04 0 bottom
R413  10K  [R0402]  25.91 46.99 90 bottom
R418  10K  [R0402]  75.44 46.99 270 top
R419  10K  [R0402]  76.45 46.99 270 top
R420  10K  [R0402]  77.47 46.99 270 top
R421  10K  [R0402]  75.44 46.99 270 bottom
R422  10K  [R0402]  76.45 46.99 270 bottom
R423  10K  [R0402]  77.47 46.99 270 bottom
R424  10K  [R0402]  39.88 42.16 180 bottom
R463  1K  [R0402]  10.9 27.25 180 bottom
R475  2.2K  [R0402]  19.94 34.17 180 top
R493  10K  [R0402]  55.12 46.99 90 bottom
R516  10K  [R0402]  76.12 13.92 90 bottom
R533  5.1K  [R0402]  9.32 11.68 90 bottom
R534  5.1K  [R0402]  1.52 7.49 180 bottom
R554  20K  [R0402]  6.12 30.35 180 bottom
R560  10K  [R0402]  23.24 46.99 90 bottom
R561  10K  [R0402]  24.71 36.32 90 bottom
R562  10K  [R0402]  25.6 36.32 90 bottom
R563  10K  [R0402]  25.6 38.58 270 bottom
R564  10K  [R0402]  28.58 36.32 90 bottom
R565  10K  [R0402]  29.46 36.32 90 bottom
R566  10K  [R0402]  63.75 16.26 0 bottom
R567  10K  [R0402]  65.91 14.22 0 bottom
R571  100K  [R0402]  63.75 15.24 0 bottom
R572  10K  [R0402]  65.91 15.24 0 bottom
R576  0R  [R0402]  35.31 38.73 270 top
R577  0R  [R0402]  68.81 10.54 270 top
R578  0R  [R0402]  68.81 10.54 270 bottom
R579  0R  [R0402]  67.84 10.54 270 bottom
R580  0R  [R0402]  67.84 10.54 90 top
R581  33R  [R0402]  69.34 21.59 180 bottom
R582  33R  [R0402]  69.34 23.62 180 bottom
R583  33R  [R0402]  49.02 46.99 90 bottom
R584  33R  [R0402]  69.34 31.75 0 bottom
R585  33R  [R0402]  48.01 46.99 90 bottom
R588  1K  [R0402]  37.21 42.04 270 bottom
R589  220R  [R0402]  27.81 22.1 90 top
R590  1K  [R0402]  6.02 43.21 0 top
R591  1K  [R0402]  6.02 44.2 0 top
R592  1K  [R0402]  6.02 45.42 0 top
R593  1K  [R0402]  6.02 47.29 0 top
R594  1K  [R0402]  6.22 15.88 0 top
R595  220R  [R0402]  7.37 48.77 270 top
R596  10K  [R0402]  39.88 46.99 90 bottom
R597  10K  [R0402]  53.09 46.99 90 bottom
R598  10K  [R0402]  43.94 46.99 90 bottom
R599  10K  [R0402]  52.07 46.99 90 bottom
R600  10K  [R0402]  57.15 46.99 90 bottom
R601  10K  [R0402]  58.17 46.99 90 bottom
R602  10K  [R0402]  59.18 46.99 90 bottom
R603  10K  [R0402]  60.2 46.99 90 bottom
R604  10K  [R0402]  61.21 46.99 90 bottom
R605  10K  [R0402]  63.25 46.99 90 bottom
R606  10K  [R0402]  62.23 46.99 90 bottom
R607  33R  [R0402]  71.81 26.67 0 bottom
R608  33R  [R0402]  71.81 24.64 0 bottom
R609  33R  [R0402]  69.34 32.77 0 bottom
R610  33R  [R0402]  33.27 39.12 180 bottom
R611  0R  [R0402]  33.4 36.39 90 bottom
R614  0R  [R0402]  69.34 44.96 0 bottom
R615  0R  [R0402]  39.88 41.15 180 bottom
R616  0R  [R0402]  69.34 43.94 0 bottom
R617  0R  [R0402]  71.81 27.69 0 bottom
R618  0R  [R0402]  71.81 28.7 180 bottom
R619  0R  [R0402]  69.34 41.91 0 bottom
R620  0R  [R0402]  69.34 38.86 0 bottom
R621  0R  [R0402]  69.34 39.88 0 bottom
R622  0R  [R0402]  69.34 33.78 0 bottom
R623  0R  [R0402]  69.34 40.89 0 bottom
R624  0R  [R0402]  69.34 37.85 180 bottom
R625  0R  [R0402]  69.34 34.8 0 bottom
R626  0R  [R0402]  69.34 35.81 0 bottom
R627  0R  [R0402]  71.81 23.62 0 bottom
R628  0R  [R0402]  69.34 42.93 0 bottom
R629  0R  [R0402]  39.88 40.13 180 bottom
R630  0R  [R0402]  71.81 25.65 180 bottom
R631  0R  [R0402]  69.34 36.83 0 bottom
R632  0R  [R0402]  61.82 10.54 270 bottom
R633  0R  [R0402]  61.82 10.54 270 top
R634  0R  [R0402]  63.8 10.54 270 top
R635  0R  [R0402]  63.8 10.54 270 bottom
R636  0R  [R0402]  60.83 10.54 90 top
R637  0R  [R0402]  60.83 10.54 270 bottom
R638  0R  [R0402]  62.81 10.54 270 bottom
R639  0R  [R0402]  62.81 10.54 270 top
R640  RL0805JR-070R1L  [R0805]  2.16 20.65 180 top
R641  0R  [R0402]  30.53 42.04 270 bottom
R642  0R  [R0402]  62.27 24.26 90 bottom
R643  0R  [R0402]  65.89 10.54 270 top
R644  0R  [R0402]  65.89 10.54 270 bottom
R645  0R  [R0402]  66.88 10.54 270 bottom
R646  0R  [R0402]  66.88 10.54 270 top
R652  0R  [R0402]  64.82 10.54 270 top
R653  0R  [R0402]  64.82 10.54 270 bottom
R656  100K  [R0402]  65.2 7.92 90 top
R657  44.2K  [R0402]  66.75 7.75 0 top
R658  36.5K  [R0402]  66.75 6.78 0 top
R659  100K  [R0402]  71.65 8.25 90 bottom
R661  10K  [R0402]  33.27 42.74 180 bottom
R662  0R  [R0402]  71.88 31.75 0 top
R663  0R  [R0402]  71.88 38.86 0 top
R664  0R  [R0402]  71.88 30.73 0 top
R665  0R  [R0402]  71.88 34.8 0 top
R666  0R  [R0402]  71.88 32.77 0 top
R667  0R  [R0402]  71.88 37.85 0 top
R668  0R  [R0402]  75.03 25.77 270 top
R669  0R  [R0402]  76.07 25.79 270 top
R670  1K  [R0402]  61.34 18.8 0 top
R671  1K  [R0402]  61.34 17.78 180 top
R672  1K  [R0402]  69.98 18.29 90 top
R673  1K  [R0402]  66.93 18.29 90 top
R674  1K  [R0402]  64.9 18.29 90 top
R675  1K  [R0402]  63.88 18.29 90 top
R676  1K  [R0402]  68.96 18.29 270 top
R677  1K  [R0402]  67.95 18.29 270 top
R678  1K  [R0402]  65.91 18.29 270 top
R679  1K  [R0402]  62.86 18.29 270 top
R680  0R  [R0402]  28.96 43.94 180 bottom
R681  0R  [R0402]  71.88 43.94 0 top
R682  0R  [R0402]  71.88 41.91 0 top
R683  0R  [R0402]  71.88 35.81 0 top
R684  0R  [R0402]  71.88 33.78 0 top
R685  0R  [R0402]  71.88 36.83 0 top
R686  0R  [R0402]  71.88 42.93 0 top
R687  0R  [R0402]  78.11 25.79 270 top
R688  0R  [R0402]  77.09 25.79 270 top
R689  100K  [R0402]  55.12 44.83 90 bottom
R690  10K  [R0402]  42.93 46.99 90 bottom
R691  10K  [R0402]  46.99 46.99 90 bottom
R692  100K  [R0402]  40.89 46.99 270 bottom
R693  100K  [R0402]  44.96 46.99 270 bottom
R694  0R  [R0402]  67.44 20.7 270 bottom
R695  0R  [R0402]  66.42 20.7 270 bottom
R696  0R  [R0402]  64.39 20.7 270 bottom
R697  0R  [R0402]  65.41 20.7 270 bottom
R698  0R  [R0402]  29.46 42.04 90 bottom
R699  RL0805JR-070R1L  [R0805]  74.85 7.32 180 top
R700  100K  [R0402]  11.05 44.83 90 top
R701  1K  [R0402]  6.07 38.91 0 top
R702  0R  [R0402]  73.25 26.26 90 top
R703  0R  [R0402]  73.25 28.19 270 top
R706  0R  [R0402]  67.84 15.49 90 top
R707  0R  [R0402]  67.46 16.92 180 top
R708  100K  [R0402]  72.67 8.25 90 bottom
S1  Tacticle Switch  [SWS4B46X28]  7.87 51.31 180 top
S3  Tacticle Switch  [SWS4B46X28]  7.87 41.15 180 top
T1  Si1902CDL-T1-GE3  [SOT363_6]  14.99 39.75 180 top
T2  Si1902CDL-T1-GE3  [SOT363_6]  14.99 42.04 180 top
TP1  NI  [TP60C_SMD]  21.52 43.66 270 bottom
TP2  NI  [TP30]  31.7 19.18 90 bottom
TP3  NI  [TP30]  26.49 10.82 90 bottom
TP4  NI  [TP30]  51.51 36.87 270 bottom
TP5  NI  [TP60C_SMD]  24.06 43.66 270 bottom
TP7  NI  [TP30]  22.44 13.78 90 bottom
TP8  NI  [TP30]  60.3 33.88 270 bottom
TP11  NI  [TP30]  26.51 12.22 180 bottom
U1  TPS51200DRCR  [VSON50P300X300X100-11N]  37.59 17.78 180 bottom
U2  D2516EC4BXGGB-U  [BGA96G]  52.12 12.35 270 top
U3  TPS6590379ZWSR  [BGA169C80P13X13_1200X1200X140]  26.11 14.22 0 top
U4  AM5729BABCXEAR  [BGA760C80P28X28_2300X2300X305]  56.3 33.73 270 top
U5  TPD12S016RKTR  [UQFN24_0D4_4X2X0_55MM]  80.2 16.8 270 bottom
U6  SN74LVC1G08DCKR  [SC70_5]  39.88 46.35 270 top
U7  EMMC16G-TB29-PZ90  [BGA153P5]  79.03 37.32 0 top
U8  SN74LVC1G07DCKR  [SC70_5]  40 28.7 90 bottom
U9  24LC32AT-I/OT  [SOT23_5]  19.56 39.57 90 bottom
U10  TPS3808G33DBVR  [SOT23_6]  36.2 46.1 270 top
U11  D2516EC4BXGGB-U  [BGA96G]  52.12 12.35 90 bottom
U12  TPS2121RUX  [VQFN12_0D5_2X2_5X1MM]  3.54 17.93 180 top
U13  HD3SS3220RNHR  [WQFN30_0D4_4_5X2_5X0_8MM]  11.35 16.69 180 top
U14  DP83867CRRGZR  [QFN48_0D5_7X7MM]  26.82 30.55 0 top
U15  TLV75801PDBVR  [SOT23_5]  32.12 24.41 180 bottom
U16  TLV75801PDBVR  [SOT23_5]  33.02 32.19 270 bottom
U17  TPD4E05U06DQAR  [USON10_0D5_2D5X1X0D5MM]  21.22 32.31 270 bottom
U18  TPD4E05U06DQAR  [USON10_0D5_2D5X1X0D5MM]  21.22 29.14 270 bottom
U37  AW-CM256SM  [WLBT90P1200X1200X160-47N]  27.71 41.83 0 top
U40  TLV75801PDBVR  [SOT23_5]  62.69 7.85 0 top
U46  SN74LVC2G241DCUT  [VSSOP8CR]  70.66 8.33 90 top
U48  TPS2051BDGN  [SOP8_1FH]  79.65 13.51 180 bottom
U78  STMPE811QTR  [QFN50P300X300X100-17N]  64.9 14.73 180 top
U88  PCMF2USB30Z  [WLCSP10C40P3X4_117X157X60N]  10.79 11.81 0 top
U89  PCMF2USB30Z  [WLCSP10C40P3X4_117X157X60N]  10.79 5.71 0 top
U90  SN74LVC1G07DCKR  [SC70_5]  26.8 41.97 270 bottom
U91  PCMF2HDMI2S  [WLCSP10C40P3X4_117X157X60N]  77.29 28.35 180 bottom
U92  PCMF2HDMI2S  [WLCSP10C40P3X4_117X157X60N]  74.7 28.35 180 bottom
X4  37.4MHz  [X4S16X12]  19.94 37.21 90 top
X6  16.384MHz  [OSCCC250X200X60-4N]  21.84 23.5 0 top
X7  20MHz  [OSCCC250X200X60-4N]  37.49 32.51 270 top
X8  22.5792MHz  [OSCCC250X200X60-4N]  37.72 37.67 270 top
X9  25MHz CL=18pF  [OSCCC250X200X60-4N]  26.47 24.59 180 top

## Library data of the parts
C1-C18 C20-C30 C33-C39 C41-C96 C98 C100-C113 C115-C140 C142-C149 C151-C157 C159 C161-C166 C168-C172 C174-C190 C192-C218 C220-C227 C230-C238 C242 C245 C254-C279 C281-C283 C285 C286 C291-C300 C320 C321 C325-C327 C334-C337 C353 C443-C446 C456 C457 C461-C464 C466 C472 C473 C480-C483 C488-C492 C495-C498 = C
C19 C40 C97 C99 C114 C141 C158 = C: signal model: CAP_0.1UF_X7R_16V_10%_0402__402_0.1uf_16V
C31 C32 = CC
D1-D5 D8 = LED
D6 D7 = DIODE ZENER_3
D46 D47 = DIODE TVS DUAL
D78 D79 = WE05R
FB1-FB10 = FB
FL1 FL2 = FL
ID1-ID3 = MARK POINT
J33 = ANT3P
J37 = JTRJ45-4118NLF
J41 = USB4A_2: Tolerance: TOL; User Part Number: PART#
J42 = USCF-001C2BC01-11
J90 = MCTF-0606
J91 = hdmis19_4p4
J92 = SIP3
L1 L2 L16-L22 L30 = L
MH1-MH4 = METALLIC HOLE
OSC1 = OSC-4
P2 = HDR_10x2_CJTAG_0
P8 P9 = HEAD2X23
Q1 Q4 = PNP
Q17 Q18 = NMOS
R1-R19 R21 R23-R194 R199-R202 R294 R333 R334 R336-R338 R385 R387 R389 R390 R392 R413 R418-R424 R463 R475 R493 R516 R533 R534 R554 R560-R567 R571 R572 R576-R585 R588-R611 R614-R646 R652 R653 R656-R659 R661-R703 R706-R708 = R
R20 = R: signal model: RES_22_1/16W_5%_0402_402_22_5%_22_5%
R22 = R: signal model: RES_0_1/16W_1%_0402_402_0_1%_0_1%
S1 S3 = PSW4
T1 T2 = NMOS_2S2G2D
TP1-TP5 TP7 TP8 TP11 = TEST POINT
U1 = TPS51200
U2 U11 = D2516EC4BXGGB_0
U3 = TPS659037
U4 = AM57X
U5 = TPD12S016
U6 = SN74LVC1G08DCKR
U7 = EMMC08G-W325-X01
U8 U90 = SN74LVC1G07DCKR
U9 = MEM_24LC32_SOT23-5
U10 = TPS3808G
U12 = TPS2121RUX
U13 = HD3SS3220
U14 = DP83867_VQFN-48P
U15 U16 U40 = SGM2032
U17 U18 = TPD4E05U06DQAR
U37 = AP6255
U46 = SN74LVC2G241DCUT
U48 = TPS2051BDGN
U78 = STMPE811QTR
U88 U89 = PCMF2USB30
U91 U92 = PCMF2HDMI2S
X4 X6-X9 = X4

## Footprints (pads in the part's own frame, mm; a bottom-side part is the same pattern mirrored in y, then rotated)
ANT3S_26X26
  rect 1.016x1.016 smd: 1(0,-1.508)
  rect 1.067x2.21 smd: 2(-1.483,0) 3(1.483,0)
BGA96G
  round 0.381 smd: A1(-3.2,6) A2(-2.4,6) A3(-1.6,6) A7(1.6,6) A8(2.4,6) A9(3.2,6) B1(-3.2,5.2) B2(-2.4,5.2) B3(-1.6,5.2) B7(1.6,5.2) B8(2.4,5.2) B9(3.2,5.2) C1(-3.2,4.4) C2(-2.4,4.4) C3(-1.6,4.4) C7(1.6,4.4) C8(2.4,4.4) C9(3.2,4.4) D1(-3.2,3.6) D2(-2.4,3.6) D3(-1.6,3.6) D7(1.6,3.6) D8(2.4,3.6) D9(3.2,3.6) E1(-3.2,2.8) E2(-2.4,2.8) E3(-1.6,2.8) E7(1.6,2.8) E8(2.4,2.8) E9(3.2,2.8) F1(-3.2,2) F2(-2.4,2) F3(-1.6,2) F7(1.6,2) F8(2.4,2) F9(3.2,2) G1(-3.2,1.2) G2(-2.4,1.2) G3(-1.6,1.2) G7(1.6,1.2) G8(2.4,1.2) G9(3.2,1.2) H1(-3.2,0.4) H2(-2.4,0.4) H3(-1.6,0.4) H7(1.6,0.4) H8(2.4,0.4) H9(3.2,0.4) J1(-3.2,-0.4) J2(-2.4,-0.4) J3(-1.6,-0.4) J7(1.6,-0.4) J8(2.4,-0.4) J9(3.2,-0.4) K1(-3.2,-1.2) K2(-2.4,-1.2) K3(-1.6,-1.2) K7(1.6,-1.2) K8(2.4,-1.2) K9(3.2,-1.2) L1(-3.2,-2) L2(-2.4,-2) L3(-1.6,-2) L7(1.6,-2) L8(2.4,-2) L9(3.2,-2) M1(-3.2,-2.8) M2(-2.4,-2.8) M3(-1.6,-2.8) M7(1.6,-2.8) M8(2.4,-2.8) M9(3.2,-2.8) N1(-3.2,-3.6) N2(-2.4,-3.6) N3(-1.6,-3.6) N7(1.6,-3.6) N8(2.4,-3.6) N9(3.2,-3.6) P1(-3.2,-4.4) P2(-2.4,-4.4) P3(-1.6,-4.4) P7(1.6,-4.4) P8(2.4,-4.4) P9(3.2,-4.4) R1(-3.2,-5.2) R2(-2.4,-5.2) R3(-1.6,-5.2) R7(1.6,-5.2) R8(2.4,-5.2) R9(3.2,-5.2) T1(-3.2,-6) T2(-2.4,-6) T3(-1.6,-6) T7(1.6,-6) T8(2.4,-6) T9(3.2,-6)
BGA153P5
  round 0.254 smd: A1(-3.25,3.25) A2(-2.75,3.25) A3(-2.25,3.25) A4(-1.75,3.25) A5(-1.25,3.25) A6(-0.75,3.25) A7(-0.25,3.25) A8(0.25,3.25) A9(0.75,3.25) A10(1.25,3.25) A11(1.75,3.25) A12(2.25,3.25) A13(2.75,3.25) A14(3.25,3.25) B1(-3.25,2.75) B2(-2.75,2.75) B3(-2.25,2.75) B4(-1.75,2.75) B5(-1.25,2.75) B6(-0.75,2.75) B7(-0.25,2.75) B8(0.25,2.75) B9(0.75,2.75) B10(1.25,2.75) B11(1.75,2.75) B12(2.25,2.75) B13(2.75,2.75) B14(3.25,2.75) C1(-3.25,2.25) C2(-2.75,2.25) C3(-2.25,2.25) C4(-1.75,2.25) C5(-1.25,2.25) C6(-0.75,2.25) C7(-0.25,2.25) C8(0.25,2.25) C9(0.75,2.25) C10(1.25,2.25) C11(1.75,2.25) C12(2.25,2.25) C13(2.75,2.25) C14(3.25,2.25) D1(-3.25,1.75) D2(-2.75,1.75) D3(-2.25,1.75) D4(-1.75,1.75) D12(2.25,1.75) D13(2.75,1.75) D14(3.25,1.75) E1(-3.25,1.25) E2(-2.75,1.25) E3(-2.25,1.25) E5(-1.25,1.25) E6(-0.75,1.25) E7(-0.25,1.25) E8(0.25,1.25) E9(0.75,1.25) E10(1.25,1.25) E12(2.25,1.25) E13(2.75,1.25) E14(3.25,1.25) F1(-3.25,0.75) F2(-2.75,0.75) F3(-2.25,0.75) F5(-1.25,0.75) F10(1.25,0.75) F12(2.25,0.75) F13(2.75,0.75) F14(3.25,0.75) G1(-3.25,0.25) G2(-2.75,0.25) G3(-2.25,0.25) G5(-1.25,0.25) G10(1.25,0.25) G12(2.25,0.25) G13(2.75,0.25) G14(3.25,0.25) H1(-3.25,-0.25) H2(-2.75,-0.25) H3(-2.25,-0.25) H5(-1.25,-0.25) H10(1.25,-0.25) H12(2.25,-0.25) H13(2.75,-0.25) H14(3.25,-0.25) J1(-3.25,-0.75) J2(-2.75,-0.75) J3(-2.25,-0.75) J5(-1.25,-0.75) J10(1.25,-0.75) J12(2.25,-0.75) J13(2.75,-0.75) J14(3.25,-0.75) K1(-3.25,-1.25) K2(-2.75,-1.25) K3(-2.25,-1.25) K5(-1.25,-1.25) K6(-0.75,-1.25) K7(-0.25,-1.25) K8(0.25,-1.25) K9(0.75,-1.25) K10(1.25,-1.25) K12(2.25,-1.25) K13(2.75,-1.25) K14(3.25,-1.25) L1(-3.25,-1.75) L2(-2.75,-1.75) L3(-2.25,-1.75) L12(2.25,-1.75) L13(2.75,-1.75) L14(3.25,-1.75) M1(-3.25,-2.25) M2(-2.75,-2.25) M3(-2.25,-2.25) M4(-1.75,-2.25) M5(-1.25,-2.25) M6(-0.75,-2.25) M7(-0.25,-2.25) M8(0.25,-2.25) M9(0.75,-2.25) M10(1.25,-2.25) M11(1.75,-2.25) M12(2.25,-2.25) M13(2.75,-2.25) M14(3.25,-2.25) N1(-3.25,-2.75) N2(-2.75,-2.75) N3(-2.25,-2.75) N4(-1.75,-2.75) N5(-1.25,-2.75) N6(-0.75,-2.75) N7(-0.25,-2.75) N8(0.25,-2.75) N9(0.75,-2.75) N10(1.25,-2.75) N11(1.75,-2.75) N12(2.25,-2.75) N13(2.75,-2.75) N14(3.25,-2.75) P1(-3.25,-3.25) P2(-2.75,-3.25) P3(-2.25,-3.25) P4(-1.75,-3.25) P5(-1.25,-3.25) P6(-0.75,-3.25) P7(-0.25,-3.25) P8(0.25,-3.25) P9(0.75,-3.25) P10(1.25,-3.25) P11(1.75,-3.25) P12(2.25,-3.25) P13(2.75,-3.25) P14(3.25,-3.25)
BGA169C80P13X13_1200X1200X140
  round 0.4 smd: A1(-4.8,4.8) A2(-4,4.8) A3(-3.2,4.8) A4(-2.4,4.8) A5(-1.6,4.8) A6(-0.8,4.8) A7(0,4.8) A8(0.8,4.8) A9(1.6,4.8) A10(2.4,4.8) A11(3.2,4.8) A12(4,4.8) A13(4.8,4.8) B1(-4.8,4) B2(-4,4) B3(-3.2,4) B4(-2.4,4) B5(-1.6,4) B6(-0.8,4) B7(0,4) B8(0.8,4) B9(1.6,4) B10(2.4,4) B11(3.2,4) B12(4,4) B13(4.8,4) C1(-4.8,3.2) C2(-4,3.2) C3(-3.2,3.2) C4(-2.4,3.2) C5(-1.6,3.2) C6(-0.8,3.2) C7(0,3.2) C8(0.8,3.2) C9(1.6,3.2) C10(2.4,3.2) C11(3.2,3.2) C12(4,3.2) C13(4.8,3.2) D1(-4.8,2.4) D2(-4,2.4) D3(-3.2,2.4) D4(-2.4,2.4) D5(-1.6,2.4) D6(-0.8,2.4) D7(0,2.4) D8(0.8,2.4) D9(1.6,2.4) D10(2.4,2.4) D11(3.2,2.4) D12(4,2.4) D13(4.8,2.4) E1(-4.8,1.6) E2(-4,1.6) E3(-3.2,1.6) E4(-2.4,1.6) E5(-1.6,1.6) E6(-0.8,1.6) E7(0,1.6) E8(0.8,1.6) E9(1.6,1.6) E10(2.4,1.6) E11(3.2,1.6) E12(4,1.6) E13(4.8,1.6) F1(-4.8,0.8) F2(-4,0.8) F3(-3.2,0.8) F4(-2.4,0.8) F5(-1.6,0.8) F6(-0.8,0.8) F7(0,0.8) F8(0.8,0.8) F9(1.6,0.8) F10(2.4,0.8) F11(3.2,0.8) F12(4,0.8) F13(4.8,0.8) G1(-4.8,0) G2(-4,0) G3(-3.2,0) G4(-2.4,0) G5(-1.6,0) G6(-0.8,0) G7(0,0) G8(0.8,0) G9(1.6,0) G10(2.4,0) G11(3.2,0) G12(4,0) G13(4.8,0) H1(-4.8,-0.8) H2(-4,-0.8) H3(-3.2,-0.8) H4(-2.4,-0.8) H5(-1.6,-0.8) H6(-0.8,-0.8) H7(0,-0.8) H8(0.8,-0.8) H9(1.6,-0.8) H10(2.4,-0.8) H11(3.2,-0.8) H12(4,-0.8) H13(4.8,-0.8) J1(-4.8,-1.6) J2(-4,-1.6) J3(-3.2,-1.6) J4(-2.4,-1.6) J5(-1.6,-1.6) J6(-0.8,-1.6) J7(0,-1.6) J8(0.8,-1.6) J9(1.6,-1.6) J10(2.4,-1.6) J11(3.2,-1.6) J12(4,-1.6) J13(4.8,-1.6) K1(-4.8,-2.4) K2(-4,-2.4) K3(-3.2,-2.4) K4(-2.4,-2.4) K5(-1.6,-2.4) K6(-0.8,-2.4) K7(0,-2.4) K8(0.8,-2.4) K9(1.6,-2.4) K10(2.4,-2.4) K11(3.2,-2.4) K12(4,-2.4) K13(4.8,-2.4) L1(-4.8,-3.2) L2(-4,-3.2) L3(-3.2,-3.2) L4(-2.4,-3.2) L5(-1.6,-3.2) L6(-0.8,-3.2) L7(0,-3.2) L8(0.8,-3.2) L9(1.6,-3.2) L10(2.4,-3.2) L11(3.2,-3.2) L12(4,-3.2) L13(4.8,-3.2) M1(-4.8,-4) M2(-4,-4) M3(-3.2,-4) M4(-2.4,-4) M5(-1.6,-4) M6(-0.8,-4) M7(0,-4) M8(0.8,-4) M9(1.6,-4) M10(2.4,-4) M11(3.2,-4) M12(4,-4) M13(4.8,-4) N1(-4.8,-4.8) N2(-4,-4.8) N3(-3.2,-4.8) N4(-2.4,-4.8) N5(-1.6,-4.8) N6(-0.8,-4.8) N7(0,-4.8) N8(0.8,-4.8) N9(1.6,-4.8) N10(2.4,-4.8) N11(3.2,-4.8) N12(4,-4.8) N13(4.8,-4.8)
BGA760C80P28X28_2300X2300X305
  round 0.4 smd: A1(-10.8,10.8) A2(-10,10.8) A3(-9.2,10.8) A4(-8.4,10.8) A5(-7.6,10.8) A6(-6.8,10.8) A7(-6,10.8) A8(-5.2,10.8) A9(-4.4,10.8) A10(-3.6,10.8) A11(-2.8,10.8) A12(-2,10.8) A13(-1.2,10.8) A14(-0.4,10.8) A15(0.4,10.8) A16(1.2,10.8) A17(2,10.8) A18(2.8,10.8) A19(3.6,10.8) A20(4.4,10.8) A21(5.2,10.8) A22(6,10.8) A23(6.8,10.8) A24(7.6,10.8) A25(8.4,10.8) A26(9.2,10.8) A27(10,10.8) A28(10.8,10.8) AA1(-10.8,-5.2) AA2(-10,-5.2) AA3(-9.2,-5.2) AA4(-8.4,-5.2) AA5(-7.6,-5.2) AA6(-6.8,-5.2) AA7(-6,-5.2) AA8(-5.2,-5.2) AA9(-4.4,-5.2) AA10(-3.6,-5.2) AA11(-2.8,-5.2) AA12(-2,-5.2) AA13(-1.2,-5.2) AA14(-0.4,-5.2) AA15(0.4,-5.2) AA16(1.2,-5.2) AA17(2,-5.2) AA18(2.8,-5.2) AA19(3.6,-5.2) AA20(4.4,-5.2) AA21(5.2,-5.2) AA22(6,-5.2) AA23(6.8,-5.2) AA24(7.6,-5.2) AA25(8.4,-5.2) AA26(9.2,-5.2) AA27(10,-5.2) AA28(10.8,-5.2) AB1(-10.8,-6) AB2(-10,-6) AB3(-9.2,-6) AB4(-8.4,-6) AB5(-7.6,-6) AB6(-6.8,-6) AB7(-6,-6) AB8(-5.2,-6) AB9(-4.4,-6) AB10(-3.6,-6) AB11(-2.8,-6) AB12(-2,-6) AB13(-1.2,-6) AB14(-0.4,-6) AB15(0.4,-6) AB16(1.2,-6) AB17(2,-6) AB18(2.8,-6) AB19(3.6,-6) AB20(4.4,-6) AB21(5.2,-6) AB22(6,-6) AB23(6.8,-6) AB24(7.6,-6) AB25(8.4,-6) AB27(10,-6) AB28(10.8,-6) AC1(-10.8,-6.8) AC2(-10,-6.8) AC3(-9.2,-6.8) AC4(-8.4,-6.8) AC5(-7.6,-6.8) AC6(-6.8,-6.8) AC7(-6,-6.8) AC8(-5.2,-6.8) AC9(-4.4,-6.8) AC10(-3.6,-6.8) AC11(-2.8,-6.8) AC12(-2,-6.8) AC13(-1.2,-6.8) AC14(-0.4,-6.8) AC15(0.4,-6.8) AC16(1.2,-6.8) AC17(2,-6.8) AC18(2.8,-6.8) AC19(3.6,-6.8) AC20(4.4,-6.8) AC21(5.2,-6.8) AC22(6,-6.8) AC23(6.8,-6.8) AC24(7.6,-6.8) AC25(8.4,-6.8) AC26(9.2,-6.8) AC27(10,-6.8) AC28(10.8,-6.8) AD1(-10.8,-7.6) AD2(-10,-7.6) AD3(-9.2,-7.6) AD4(-8.4,-7.6) AD5(-7.6,-7.6) AD6(-6.8,-7.6) AD7(-6,-7.6) AD8(-5.2,-7.6) AD9(-4.4,-7.6) AD10(-3.6,-7.6) AD11(-2.8,-7.6) AD12(-2,-7.6) AD13(-1.2,-7.6) AD14(-0.4,-7.6) AD15(0.4,-7.6) AD16(1.2,-7.6) AD17(2,-7.6) AD18(2.8,-7.6) AD19(3.6,-7.6) AD20(4.4,-7.6) AD21(5.2,-7.6) AD22(6,-7.6) AD23(6.8,-7.6) AD24(7.6,-7.6) AD25(8.4,-7.6) AD26(9.2,-7.6) AD27(10,-7.6) AD28(10.8,-7.6) AE1(-10.8,-8.4) AE2(-10,-8.4) AE3(-9.2,-8.4) AE5(-7.6,-8.4) AE6(-6.8,-8.4) AE7(-6,-8.4) AE8(-5.2,-8.4) AE9(-4.4,-8.4) AE10(-3.6,-8.4) AE11(-2.8,-8.4) AE12(-2,-8.4) AE13(-1.2,-8.4) AE14(-0.4,-8.4) AE15(0.4,-8.4) AE16(1.2,-8.4) AE17(2,-8.4) AE18(2.8,-8.4) AE19(3.6,-8.4) AE20(4.4,-8.4) AE21(5.2,-8.4) AE22(6,-8.4) AE23(6.8,-8.4) AE24(7.6,-8.4) AE26(9.2,-8.4) AE27(10,-8.4) AE28(10.8,-8.4) AF1(-10.8,-9.2) AF2(-10,-9.2) AF3(-9.2,-9.2) AF4(-8.4,-9.2) AF5(-7.6,-9.2) AF6(-6.8,-9.2) AF8(-5.2,-9.2) AF9(-4.4,-9.2) AF11(-2.8,-9.2) AF12(-2,-9.2) AF14(-0.4,-9.2) AF15(0.4,-9.2) AF17(2,-9.2) AF18(2.8,-9.2) AF20(4.4,-9.2) AF21(5.2,-9.2) AF22(6,-9.2) AF23(6.8,-9.2) AF24(7.6,-9.2) AF25(8.4,-9.2) AF26(9.2,-9.2) AF27(10,-9.2) AF28(10.8,-9.2) AG1(-10.8,-10) AG2(-10,-10) AG3(-9.2,-10) AG4(-8.4,-10) AG5(-7.6,-10) AG6(-6.8,-10) AG7(-6,-10) AG8(-5.2,-10) AG9(-4.4,-10) AG10(-3.6,-10) AG11(-2.8,-10) AG12(-2,-10) AG13(-1.2,-10) AG14(-0.4,-10) AG15(0.4,-10) AG16(1.2,-10) AG17(2,-10) AG18(2.8,-10) AG19(3.6,-10) AG20(4.4,-10) AG21(5.2,-10) AG22(6,-10) AG23(6.8,-10) AG24(7.6,-10) AG25(8.4,-10) AG26(9.2,-10) AG27(10,-10) AG28(10.8,-10) AH1(-10.8,-10.8) AH2(-10,-10.8) AH3(-9.2,-10.8) AH4(-8.4,-10.8) AH5(-7.6,-10.8) AH6(-6.8,-10.8) AH7(-6,-10.8) AH8(-5.2,-10.8) AH9(-4.4,-10.8) AH10(-3.6,-10.8) AH11(-2.8,-10.8) AH12(-2,-10.8) AH13(-1.2,-10.8) AH14(-0.4,-10.8) AH15(0.4,-10.8) AH16(1.2,-10.8) AH17(2,-10.8) AH18(2.8,-10.8) AH19(3.6,-10.8) AH20(4.4,-10.8) AH21(5.2,-10.8) AH22(6,-10.8) AH23(6.8,-10.8) AH24(7.6,-10.8) AH25(8.4,-10.8) AH26(9.2,-10.8) AH27(10,-10.8) AH28(10.8,-10.8) B1(-10.8,10) B2(-10,10) B3(-9.2,10) B4(-8.4,10) B5(-7.6,10) B6(-6.8,10) B7(-6,10) B8(-5.2,10) B9(-4.4,10) B10(-3.6,10) B11(-2.8,10) B12(-2,10) B13(-1.2,10) B14(-0.4,10) B15(0.4,10) B16(1.2,10) B17(2,10) B18(2.8,10) B19(3.6,10) B20(4.4,10) B21(5.2,10) B22(6,10) B23(6.8,10) B24(7.6,10) B25(8.4,10) B26(9.2,10) B27(10,10) B28(10.8,10) C1(-10.8,9.2) C2(-10,9.2) C3(-9.2,9.2) C4(-8.4,9.2) C5(-7.6,9.2) C6(-6.8,9.2) C7(-6,9.2) C8(-5.2,9.2) C9(-4.4,9.2) C11(-2.8,9.2) C12(-2,9.2) C14(-0.4,9.2) C15(0.4,9.2) C17(2,9.2) C18(2.8,9.2) C20(4.4,9.2) C21(5.2,9.2) C23(6.8,9.2) C24(7.6,9.2) C25(8.4,9.2) C26(9.2,9.2) C27(10,9.2) C28(10.8,9.2) D1(-10.8,8.4) D2(-10,8.4) D3(-9.2,8.4) D5(-7.6,8.4) D6(-6.8,8.4) D7(-6,8.4) D8(-5.2,8.4) D9(-4.4,8.4) D10(-3.6,8.4) D11(-2.8,8.4) D12(-2,8.4) D13(-1.2,8.4) D14(-0.4,8.4) D15(0.4,8.4) D16(1.2,8.4) D17(2,8.4) D18(2.8,8.4) D19(3.6,8.4) D20(4.4,8.4) D21(5.2,8.4) D22(6,8.4) D23(6.8,8.4) D24(7.6,8.4) D26(9.2,8.4) D27(10,8.4) D28(10.8,8.4) E1(-10.8,7.6) E2(-10,7.6) E3(-9.2,7.6) E4(-8.4,7.6) E5(-7.6,7.6) E6(-6.8,7.6) E7(-6,7.6) E8(-5.2,7.6) E9(-4.4,7.6) E10(-3.6,7.6) E11(-2.8,7.6) E12(-2,7.6) E13(-1.2,7.6) E14(-0.4,7.6) E15(0.4,7.6) E16(1.2,7.6) E17(2,7.6) E18(2.8,7.6) E19(3.6,7.6) E20(4.4,7.6) E21(5.2,7.6) E22(6,7.6) E23(6.8,7.6) E24(7.6,7.6) E25(8.4,7.6) E26(9.2,7.6) E27(10,7.6) E28(10.8,7.6) F1(-10.8,6.8) F2(-10,6.8) F3(-9.2,6.8) F4(-8.4,6.8) F5(-7.6,6.8) F6(-6.8,6.8) F7(-6,6.8) F8(-5.2,6.8) F9(-4.4,6.8) F10(-3.6,6.8) F11(-2.8,6.8) F12(-2,6.8) F13(-1.2,6.8) F14(-0.4,6.8) F15(0.4,6.8) F16(1.2,6.8) F17(2,6.8) F18(2.8,6.8) F19(3.6,6.8) F20(4.4,6.8) F21(5.2,6.8) F22(6,6.8) F23(6.8,6.8) F24(7.6,6.8) F25(8.4,6.8) F26(9.2,6.8) F27(10,6.8) F28(10.8,6.8) G1(-10.8,6) G2(-10,6) G4(-8.4,6) G5(-7.6,6) G6(-6.8,6) G7(-6,6) G8(-5.2,6) G9(-4.4,6) G10(-3.6,6) G11(-2.8,6) G12(-2,6) G13(-1.2,6) G14(-0.4,6) G15(0.4,6) G16(1.2,6) G17(2,6) G18(2.8,6) G19(3.6,6) G20(4.4,6) G21(5.2,6) G22(6,6) G23(6.8,6) G24(7.6,6) G25(8.4,6) G26(9.2,6) G27(10,6) G28(10.8,6) H1(-10.8,5.2) H2(-10,5.2) H3(-9.2,5.2) H4(-8.4,5.2) H5(-7.6,5.2) H6(-6.8,5.2) H7(-6,5.2) H8(-5.2,5.2) H9(-4.4,5.2) H10(-3.6,5.2) H11(-2.8,5.2) H12(-2,5.2) H13(-1.2,5.2) H14(-0.4,5.2) H15(0.4,5.2) H16(1.2,5.2) H17(2,5.2) H18(2.8,5.2) H19(3.6,5.2) H20(4.4,5.2) H21(5.2,5.2) H22(6,5.2) H23(6.8,5.2) H24(7.6,5.2) H25(8.4,5.2) H26(9.2,5.2) H27(10,5.2) H28(10.8,5.2) J1(-10.8,4.4) J2(-10,4.4) J3(-9.2,4.4) J4(-8.4,4.4) J5(-7.6,4.4) J6(-6.8,4.4) J7(-6,4.4) J8(-5.2,4.4) J9(-4.4,4.4) J10(-3.6,4.4) J11(-2.8,4.4) J12(-2,4.4) J13(-1.2,4.4) J14(-0.4,4.4) J15(0.4,4.4) J16(1.2,4.4) J17(2,4.4) J18(2.8,4.4) J19(3.6,4.4) J20(4.4,4.4) J21(5.2,4.4) J22(6,4.4) J23(6.8,4.4) J24(7.6,4.4) J25(8.4,4.4) J26(9.2,4.4) J27(10,4.4) J28(10.8,4.4) K1(-10.8,3.6) K2(-10,3.6) K4(-8.4,3.6) K5(-7.6,3.6) K6(-6.8,3.6) K7(-6,3.6) K8(-5.2,3.6) K9(-4.4,3.6) K10(-3.6,3.6) K11(-2.8,3.6) K12(-2,3.6) K13(-1.2,3.6) K14(-0.4,3.6) K15(0.4,3.6) K16(1.2,3.6) K17(2,3.6) K18(2.8,3.6) K19(3.6,3.6) K20(4.4,3.6) K21(5.2,3.6) K22(6,3.6) K23(6.8,3.6) K24(7.6,3.6) K25(8.4,3.6) K27(10,3.6) K28(10.8,3.6) L1(-10.8,2.8) L2(-10,2.8) L3(-9.2,2.8) L4(-8.4,2.8) L5(-7.6,2.8) L6(-6.8,2.8) L7(-6,2.8) L8(-5.2,2.8) L9(-4.4,2.8) L10(-3.6,2.8) L11(-2.8,2.8) L12(-2,2.8) L13(-1.2,2.8) L14(-0.4,2.8) L15(0.4,2.8) L16(1.2,2.8) L17(2,2.8) L18(2.8,2.8) L19(3.6,2.8) L20(4.4,2.8) L21(5.2,2.8) L22(6,2.8) L23(6.8,2.8) L24(7.6,2.8) L25(8.4,2.8) L26(9.2,2.8) L27(10,2.8) L28(10.8,2.8) M1(-10.8,2) M2(-10,2) M3(-9.2,2) M4(-8.4,2) M5(-7.6,2) M6(-6.8,2) M7(-6,2) M8(-5.2,2) M9(-4.4,2) M10(-3.6,2) M11(-2.8,2) M12(-2,2) M13(-1.2,2) M14(-0.4,2) M15(0.4,2) M16(1.2,2) M17(2,2) M18(2.8,2) M19(3.6,2) M20(4.4,2) M21(5.2,2) M22(6,2) M23(6.8,2) M24(7.6,2) M25(8.4,2) M26(9.2,2) M27(10,2) M28(10.8,2) N1(-10.8,1.2) N2(-10,1.2) N4(-8.4,1.2) N5(-7.6,1.2) N6(-6.8,1.2) N7(-6,1.2) N8(-5.2,1.2) N9(-4.4,1.2) N10(-3.6,1.2) N11(-2.8,1.2) N12(-2,1.2) N13(-1.2,1.2) N14(-0.4,1.2) N15(0.4,1.2) N16(1.2,1.2) N17(2,1.2) N18(2.8,1.2) N19(3.6,1.2) N20(4.4,1.2) N21(5.2,1.2) N22(6,1.2) N23(6.8,1.2) N24(7.6,1.2) N25(8.4,1.2) N27(10,1.2) N28(10.8,1.2) P1(-10.8,0.4) P2(-10,0.4) P3(-9.2,0.4) P4(-8.4,0.4) P5(-7.6,0.4) P6(-6.8,0.4) P7(-6,0.4) P8(-5.2,0.4) P9(-4.4,0.4) P10(-3.6,0.4) P11(-2.8,0.4) P12(-2,0.4) P13(-1.2,0.4) P14(-0.4,0.4) P15(0.4,0.4) P16(1.2,0.4) P17(2,0.4) P18(2.8,0.4) P19(3.6,0.4) P20(4.4,0.4) P21(5.2,0.4) P22(6,0.4) P23(6.8,0.4) P24(7.6,0.4) P25(8.4,0.4) P26(9.2,0.4) P27(10,0.4) P28(10.8,0.4) R1(-10.8,-0.4) R2(-10,-0.4) R3(-9.2,-0.4) R4(-8.4,-0.4) R5(-7.6,-0.4) R6(-6.8,-0.4) R7(-6,-0.4) R8(-5.2,-0.4) R9(-4.4,-0.4) R10(-3.6,-0.4) R11(-2.8,-0.4) R12(-2,-0.4) R13(-1.2,-0.4) R14(-0.4,-0.4) R15(0.4,-0.4) R16(1.2,-0.4) R17(2,-0.4) R18(2.8,-0.4) R19(3.6,-0.4) R20(4.4,-0.4) R21(5.2,-0.4) R22(6,-0.4) R23(6.8,-0.4) R24(7.6,-0.4) R25(8.4,-0.4) R26(9.2,-0.4) R27(10,-0.4) R28(10.8,-0.4) T1(-10.8,-1.2) T2(-10,-1.2) T4(-8.4,-1.2) T5(-7.6,-1.2) T6(-6.8,-1.2) T7(-6,-1.2) T8(-5.2,-1.2) T9(-4.4,-1.2) T10(-3.6,-1.2) T11(-2.8,-1.2) T12(-2,-1.2) T13(-1.2,-1.2) T14(-0.4,-1.2) T15(0.4,-1.2) T16(1.2,-1.2) T17(2,-1.2) T18(2.8,-1.2) T19(3.6,-1.2) T20(4.4,-1.2) T21(5.2,-1.2) T22(6,-1.2) T23(6.8,-1.2) T24(7.6,-1.2) T25(8.4,-1.2) T27(10,-1.2) T28(10.8,-1.2) U1(-10.8,-2) U2(-10,-2) U3(-9.2,-2) U4(-8.4,-2) U5(-7.6,-2) U6(-6.8,-2) U7(-6,-2) U8(-5.2,-2) U9(-4.4,-2) U10(-3.6,-2) U11(-2.8,-2) U12(-2,-2) U13(-1.2,-2) U14(-0.4,-2) U15(0.4,-2) U16(1.2,-2) U17(2,-2) U18(2.8,-2) U19(3.6,-2) U20(4.4,-2) U21(5.2,-2) U22(6,-2) U23(6.8,-2) U24(7.6,-2) U25(8.4,-2) U26(9.2,-2) U27(10,-2) U28(10.8,-2) V1(-10.8,-2.8) V2(-10,-2.8) V3(-9.2,-2.8) V4(-8.4,-2.8) V5(-7.6,-2.8) V6(-6.8,-2.8) V7(-6,-2.8) V8(-5.2,-2.8) V9(-4.4,-2.8) V10(-3.6,-2.8) V11(-2.8,-2.8) V12(-2,-2.8) V13(-1.2,-2.8) V14(-0.4,-2.8) V15(0.4,-2.8) V16(1.2,-2.8) V17(2,-2.8) V18(2.8,-2.8) V19(3.6,-2.8) V20(4.4,-2.8) V21(5.2,-2.8) V22(6,-2.8) V23(6.8,-2.8) V24(7.6,-2.8) V25(8.4,-2.8) V26(9.2,-2.8) V27(10,-2.8) V28(10.8,-2.8) W1(-10.8,-3.6) W2(-10,-3.6) W4(-8.4,-3.6) W5(-7.6,-3.6) W6(-6.8,-3.6) W7(-6,-3.6) W8(-5.2,-3.6) W9(-4.4,-3.6) W10(-3.6,-3.6) W11(-2.8,-3.6) W12(-2,-3.6) W13(-1.2,-3.6) W14(-0.4,-3.6) W15(0.4,-3.6) W16(1.2,-3.6) W17(2,-3.6) W18(2.8,-3.6) W19(3.6,-3.6) W20(4.4,-3.6) W21(5.2,-3.6) W22(6,-3.6) W23(6.8,-3.6) W24(7.6,-3.6) W25(8.4,-3.6) W27(10,-3.6) W28(10.8,-3.6) Y1(-10.8,-4.4) Y2(-10,-4.4) Y3(-9.2,-4.4) Y4(-8.4,-4.4) Y5(-7.6,-4.4) Y6(-6.8,-4.4) Y7(-6,-4.4) Y8(-5.2,-4.4) Y9(-4.4,-4.4) Y10(-3.6,-4.4) Y11(-2.8,-4.4) Y12(-2,-4.4) Y13(-1.2,-4.4) Y14(-0.4,-4.4) Y15(0.4,-4.4) Y16(1.2,-4.4) Y17(2,-4.4) Y18(2.8,-4.4) Y19(3.6,-4.4) Y20(4.4,-4.4) Y21(5.2,-4.4) Y22(6,-4.4) Y23(6.8,-4.4) Y24(7.6,-4.4) Y25(8.4,-4.4) Y26(9.2,-4.4) Y27(10,-4.4) Y28(10.8,-4.4)
